# Altium PCB PCB2.PcbDoc (part 1 of 2)
Units mil, origin at the board's own origin, x right, y up, seen from the top; angles counter-clockwise.
Board outline 4285 x 3645 mil, 4 copper layers (Top Layer, Int1 (GND), Int2 (PWR), Bottom Layer), stack 53.912 mil thick; 114 components, 93 nets, 393 pads, 69 vias.
Unrouted connection lines stored in the file: 1.
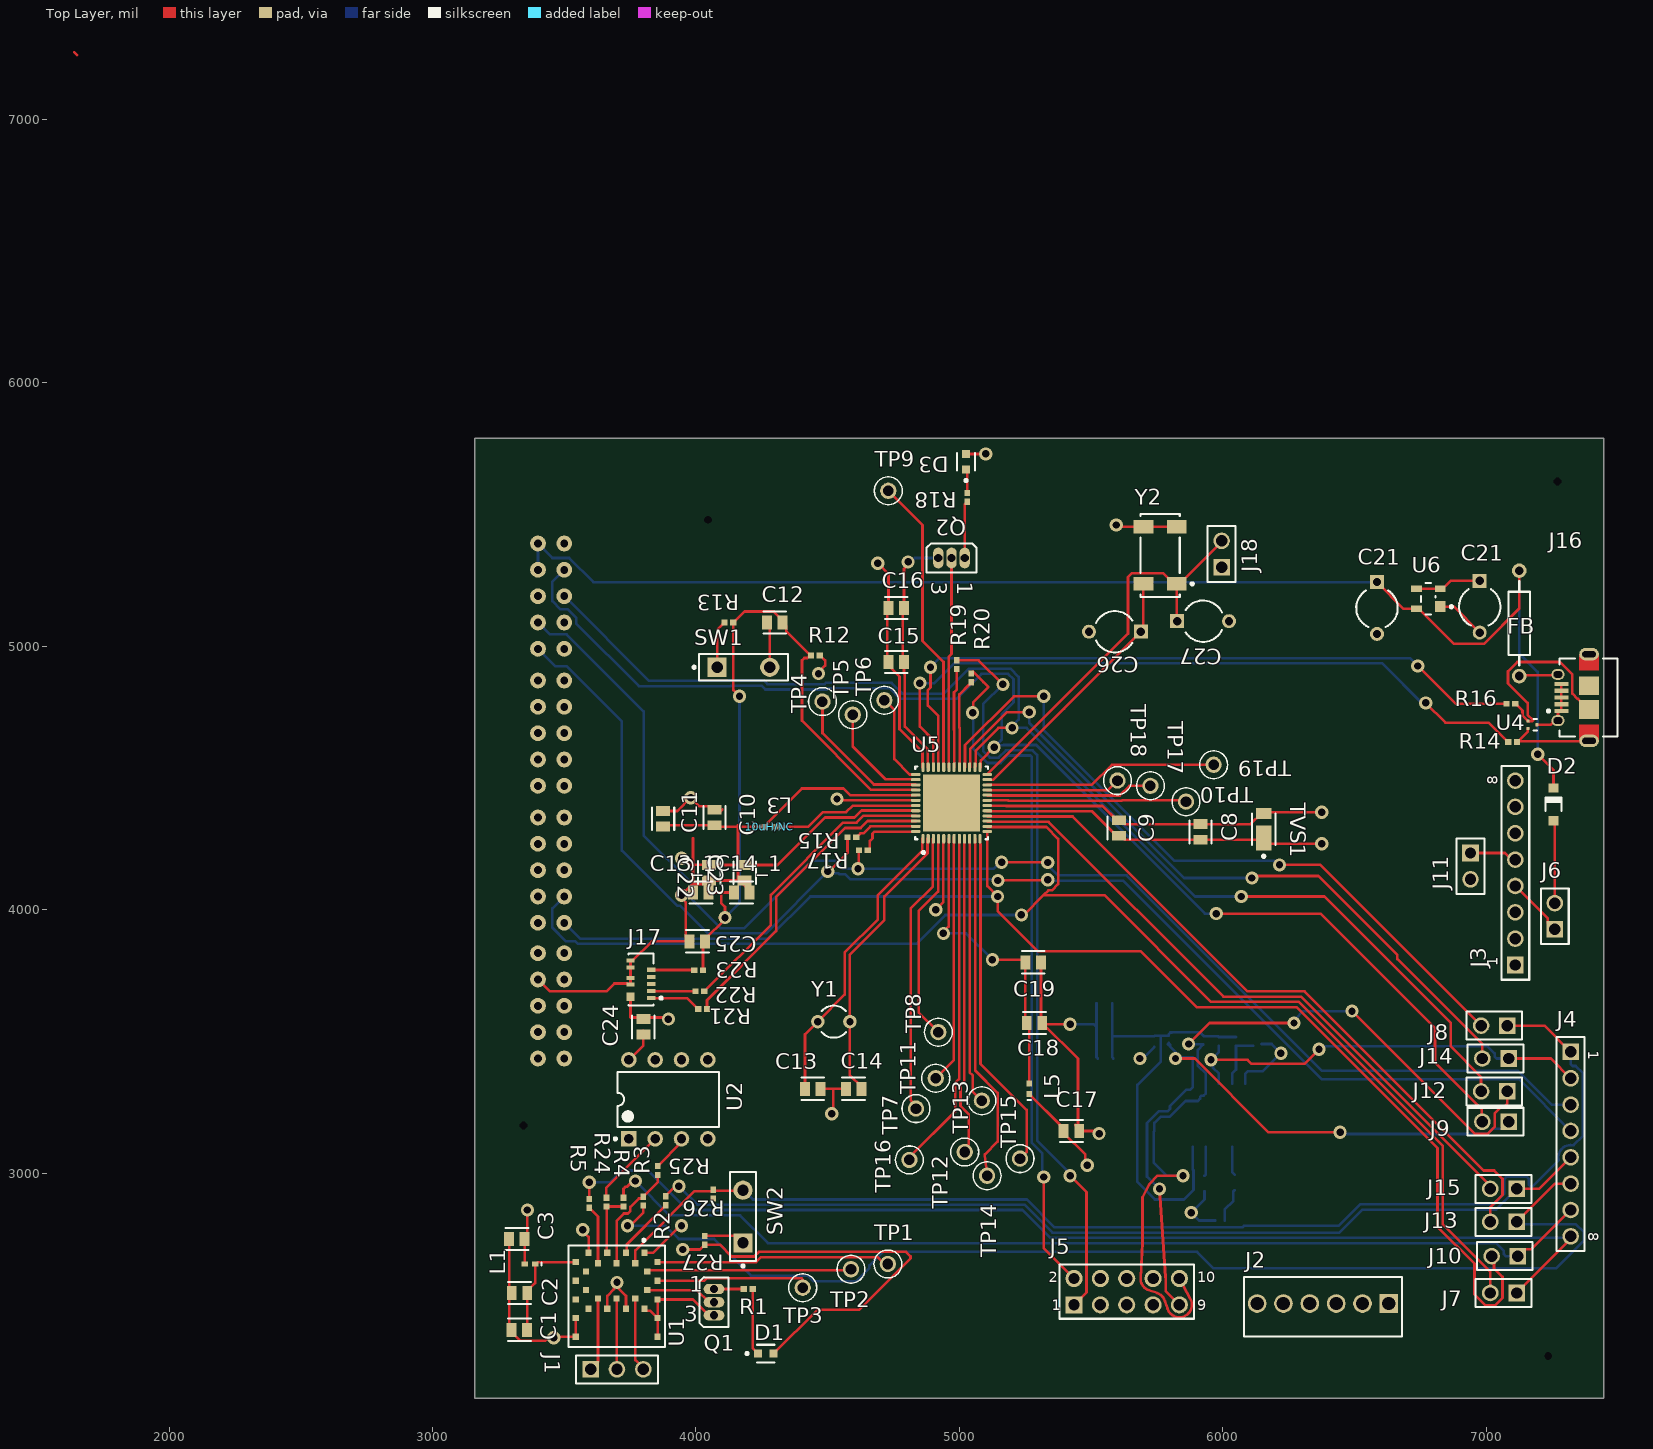
[diagram p0: Top Layer view]
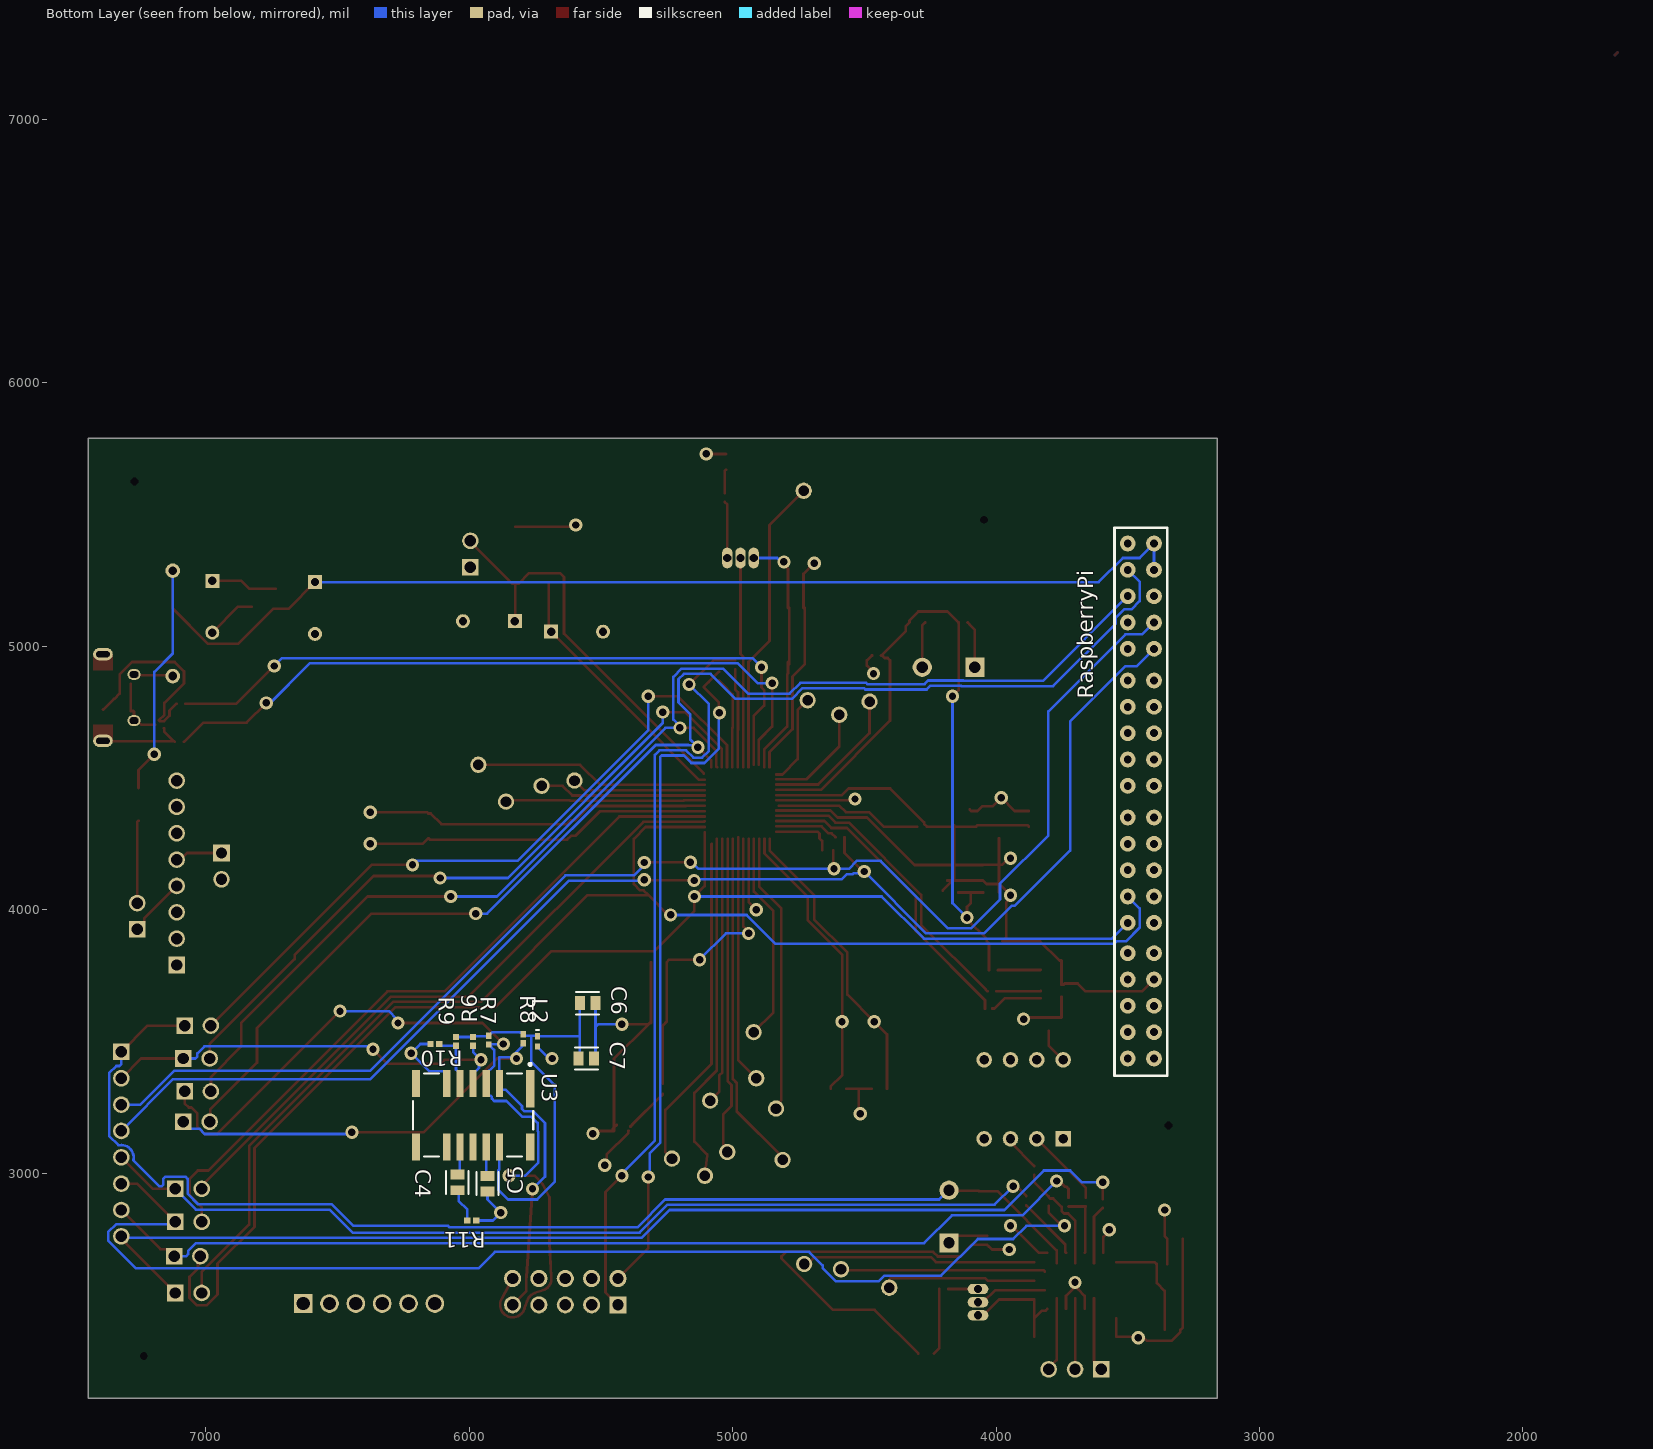
[diagram p1: Bottom Layer view, seen from below]
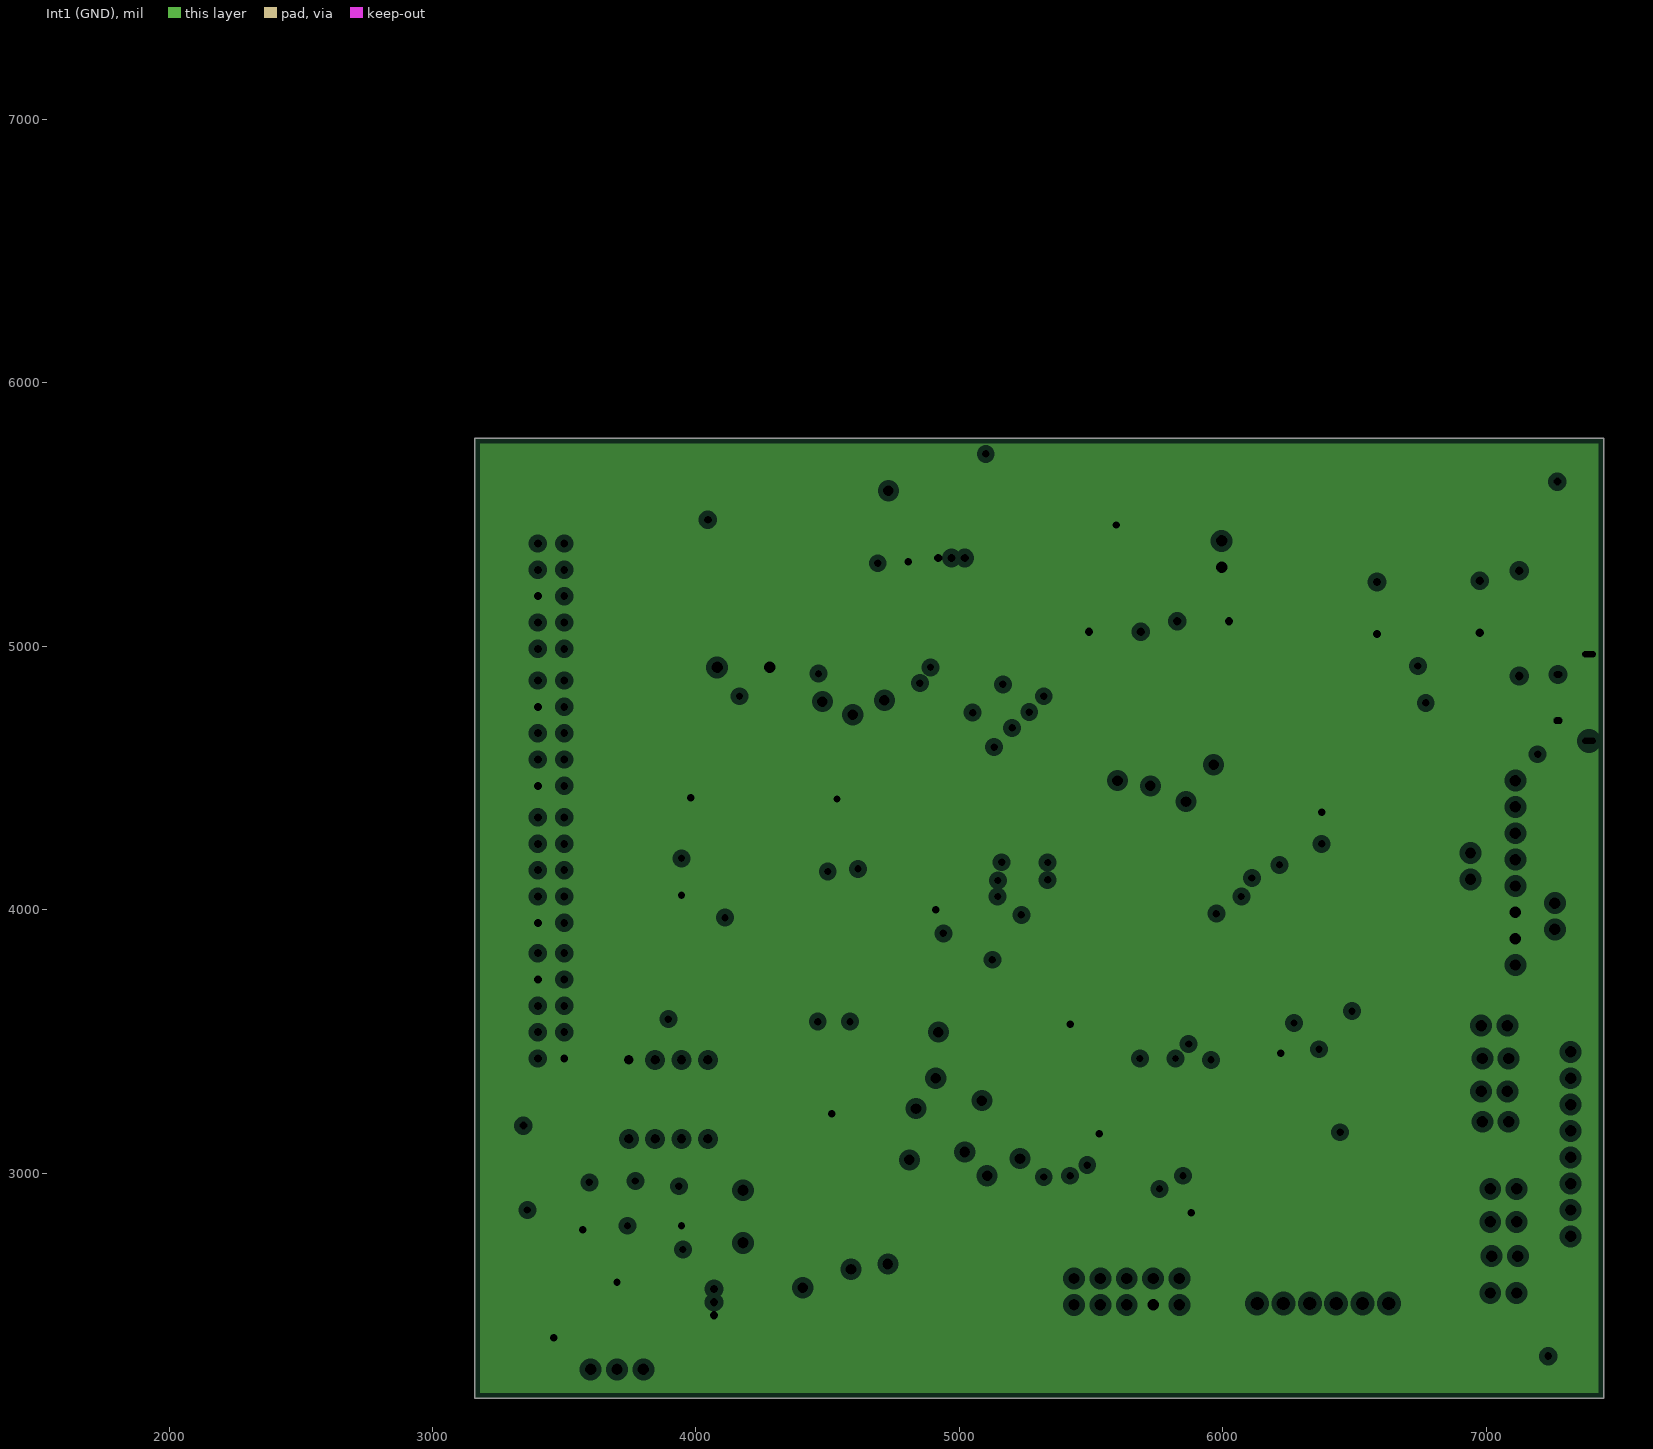
[diagram p2: Int1 (GND), clearances drawn from the general rule]
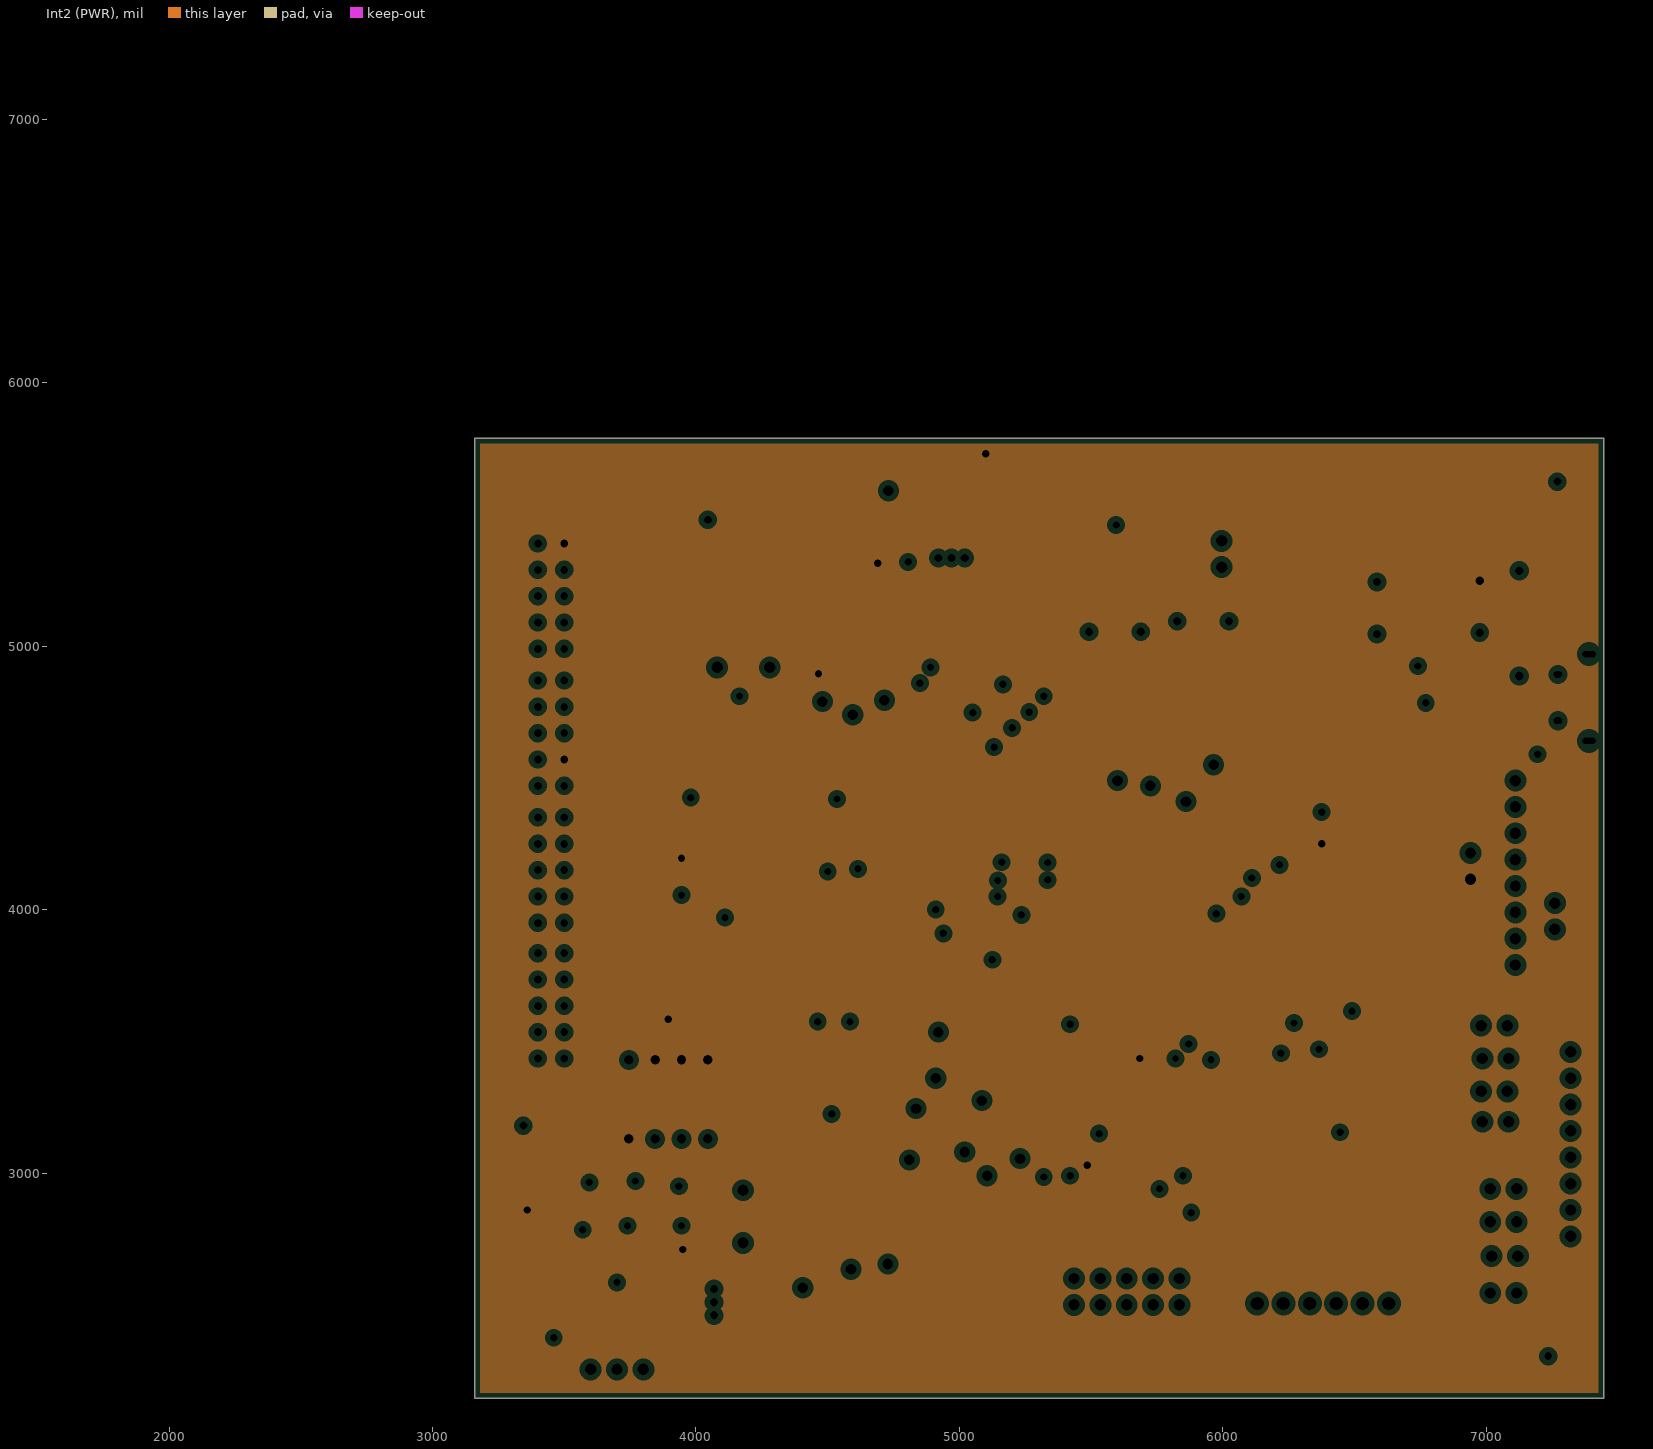
[diagram p3: Int2 (PWR), clearances drawn from the general rule]
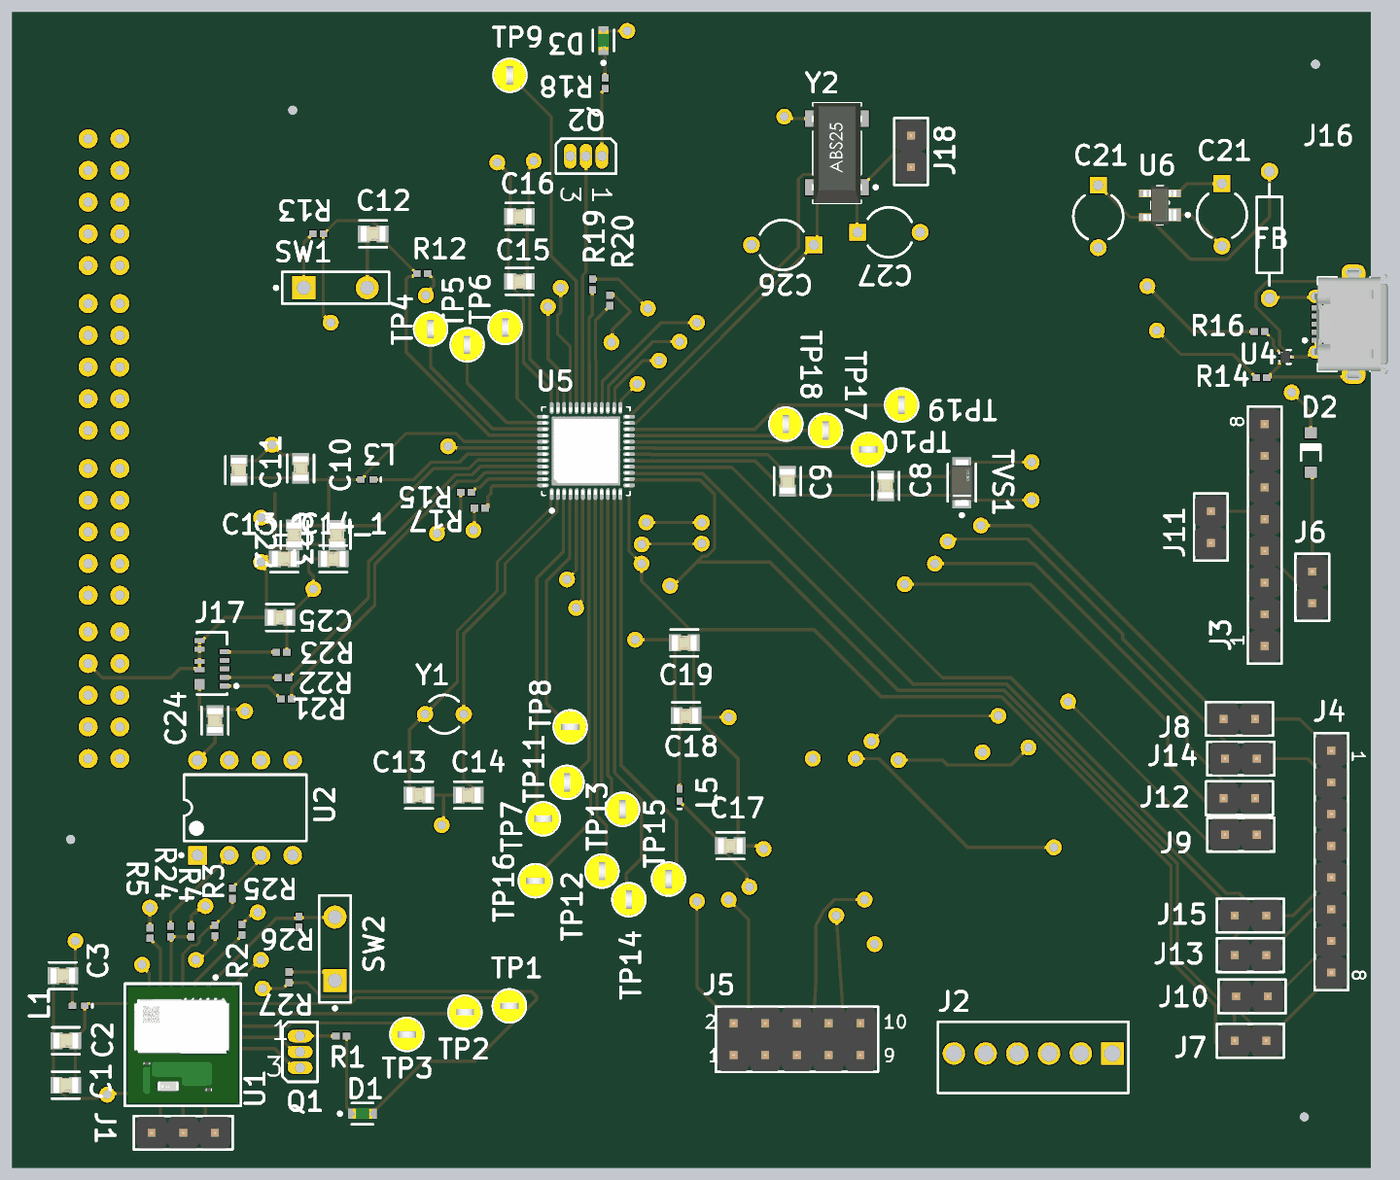
[diagram p4: 3D render of the assembled board from above, using the file's embedded part models]

## Layer stack, top to bottom
Top Solder: solder mask 1, SM-001, Dk 4
Top Layer: signal copper 1.378
Dielectric 1: prepreg 5.1, PP-017, Dk 4.3
Dielectric 2: prepreg 5.1, PP-017, Dk 4.3
Int1 (GND): plane copper 1.378, net GND
Dielectric 3: core 28, Core-039, Dk 4.8
Int2 (PWR): plane copper 1.378, net VDD3.3
Dielectric 4: prepreg 5.1, PP-017, Dk 4.3
Dielectric 5: prepreg 5.1, PP-017, Dk 4.3
Bottom Layer: signal copper 1.378
Bottom Solder: solder mask 1, SM-001, Dk 4

## Board outline
3160,2145 7445,2145 7445,5790 3160,5790

## Design rules (kind name [scope] priority, off if disabled: settings)
Clearance [All] p1: gap=10 ignorepadtopadclearanceinfootprint=FALSE except(0: Arc-Hole Track-Hole SMDPad-Hole THPad-Hole Via-Hole Fill-Hole Poly-Hole Region-Hole Text-Hole)
PlaneClearance [All] p1: clearance=20
PlaneConnect [All] p1: planeconnectstyle=Relief reliefexpansion=20 reliefentries=4 reliefconductorwidth=10 reliefairgap=10
PolygonConnect [All] p1: connectstyle=Relief reliefconductorwidth=10 reliefentries=4 polygonreliefangle="90 Angle" airgapwidth=10
RoutingVias [All] p1: holewidth=28 width=50 viastyle="Through Hole" minholewidth=28 minwidth=50 maxholewidth=28 maxwidth=50
SolderMaskExpansion [All] p1: expansion=4 istentingtop=FALSE
Width [All] p1: maxlimit=10 minlimit=10 preferedwidth=10
28 further rules are at their usual default settings.

## Classes and differential pairs
component class Sheet3: C1 C2 C3 D1 J1 L1 Q1 R1 R2 R3 R4 R5 R24 R25 R26 R27 SW2 TP1 TP2 TP3 U1 U2
component class Sheet2: C4 C5 C6 C7 D2 J2 J3 J4 J5 J6 j6 J7 J8 J9 J10 J11 J12 J13 J14 J15 L2 R6 R7 R8 R9 R10 R11 U3
component class Sheet1: 10uH/NC C8 C9 C10 C11 C12 C13 C14 C15 C16 C17 C18 C19 C21 C22 C23 C24 C25 C26 C27 D3 FB J16 J17 J18 L5 Q2 R12 R13 R14 R15 R16 R17 R18 R19 R20 R21 R22 R23 SW1 TP4 TP5 TP6 TP7 TP8 TP9 TP10 TP11 TP12 TP13 TP14 TP15 TP16 TP17 TP18 TP19 TVS1 U4 U5 U6 Y1 Y2

## Components (designator, comment, footprint, x,y, rotation, side; value= is the part's Value field where it differs from the comment)
10uH/NC "L3" 0402-A 4279.69,4315 r180 top value=10uH
C1 "10UF" FP-C0805C-DN-MFG 3329.53,2405 r180 top value="0.10 μF"
C2 "10UF" FP-C0805C-DN-MFG 3330,2545 r180 top value="0.10 μF"
C3 "10UF" FP-C0805C-DN-MFG 3320,2750 r180 top value="0.10 μF"
C4 "1UF" FP-C0805C-DN-MFG 6045,2964.53 r90 bottom value="0.10 μF"
C5 "1.5UF" FP-C0805C-DN-MFG 5930,2960 r90 bottom value="0.10 μF"
C6 "10UF" FP-C0805C-DN-MFG 5550,3645 r0 bottom value="0.10 μF"
C7 "100NF" FP-C0805C-DN-MFG 5555,3435 r0 bottom value="0.10 μF"
C8 "10UF" FP-C0805C-DN-MFG 5915,4295 r90 top value="0.10 μF"
C9 "100NF" FP-C0805C-DN-MFG 5605,4310 r90 top value="0.10 μF"
C10 "1UF" FP-C0805C-DN-MFG 4070,4350 r90 top value="0.10 μF"
C11 "100NF" FP-C0805C-DN-MFG 3875,4345 r90 top value="0.10 μF"
C12 "100PF" FP-C0805C-DN-MFG 4298.74,5090 r180 top value="0.10 μF"
C13 "22PF" FP-C0805C-DN-MFG 4443.27,3320 r180 top value="0.10 μF"
C13_1 "22PF" FP-C0805C-DN-MFG 4018.27,4065 r180 top value="0.10 μF" (schematic designator C13)
C14 "22PF" FP-C0805C-DN-MFG 4598.27,3320 r0 top value="0.10 μF"
C14_1 "22PF" FP-C0805C-DN-MFG 4173.27,4065 r0 top value="0.10 μF" (schematic designator C14)
C15 "100NF" FP-C0805C-DN-MFG 4760,4940 r0 top value="0.10 μF"
C16 "10UF" FP-C0805C-DN-MFG 4760,5145 r0 top value="0.10 μF"
C17 "10UF" FP-C0805C-DN-MFG 5425,3160 r180 top value="0.10 μF"
C18 "10UF" FP-C0805C-DN-MFG 5285,3570 r0 top value="0.10 μF"
C19 "100NF" FP-C0805C-DN-MFG 5280,3800 r0 top value="0.10 μF"
C21 "Cap2" CAPR5-4X5 6975,5150 r270 top value=10uF
C21 "Cap2" CAPR5-4X5 6585,5145 r270 top value=10uF
C22 "100NF" FP-C0805C-DN-MFG 4050,4140.47 r270 top value="0.10 μF"
C23 "10UF" FP-C0805C-DN-MFG 4185,4140 r270 top value="0.10 μF"
C24 "0.1UF" FP-C0805C-DN-MFG 3800,3555 r270 top value="0.10 μF"
C25 "100PF" FP-C0805C-DN-MFG 4005,3880 r180 top value="0.10 μF"
C26 "Cap2" CAPR5-4X5 5590,5055 r180 top value=12pF
C27 "Cap2" CAPR5-4X5 5925,5095 r0 top value=12pF
D1 "RED" FP-LTST-C190GKT-MFG 4265,2315 r0 top
D2 "1N4148W-7-F" DIOD-SOD123-2_V 7255,4400 r90 top
D3 "RED" FP-LTST-C190GKT-MFG 5025,5700 r90 top
FB "Res2" AXIAL-0.4 7125,5086.73 r270 top value=L4
J1 "61300311121" 61300311121 3700,2255 r0 top
J2 "ARDUINOHEADER" TECO-640456-6_V 6630,2505 r180 top
J3 "61300811121" 61300811121 7110,4140 r90 top
J4 "61300811121" 61300811121 7320,3110 r270 top
J5 "61301021121" 61301021121 5635,2550 r0 top
J6 "61300211121" 61300211121 7260,3975 r90 top
J7 "61300211121" 61300211121 7065,2545 r180 top
J8 "61300211121" 61300211121 7030,3560 r180 top
J9 "61300211121" 61300211121 7035,3195 r180 top
J10 "61300211121" 61300211121 7070,2685 r180 top
J11 "61300211121" 61300211121 6940,4165 r270 top
J12 "61300211121" 61300211121 7030,3310 r180 top
J13 "61300211121" 61300211121 7065,2815 r180 top
J14 "61300211121" 61300211121 7035,3435 r180 top
J15 "61300211121" 61300211121 7065,2940 r180 top
J16 "47589-0001" MOLX-47589-0001_V 7330.94,4805.28 r90 top
J17 "50 MIL KEYED SMD" VISH-VCNL4020-GS08_V 3790.63,3735.55 r180 top
J18 "61300211121" 61300211121 5995,5350 r90 top
L1 "Inductor" 0402-A 3370,2655 r180 top value=10uH
L2 "Inductor" 0402-A 5740,3500 r270 bottom value=10uH
L5 "Inductor" 0402-A 5265,3320 r90 top value=10uH
Q1 "BSS138LT3G" E3 4068.27,2510 r0 top
Q2 "BSS138LT3G" E3 4970,5335 r270 top
R1 "270" RESC1005X40X25NL05T10 4198.27,2560 r0 top
R2 "ZERO" RESC1005X40X25NL05T10 3885,2895 r270 top
R3 "ZERO" RESC1005X40X25NL05T10 3800,2893.27 r90 top
R4 "ZERO" RESC1005X40X25NL05T10 3725,2890 r270 top
R5 "ZERO" RESC1005X40X25NL05T10 3595,2885 r270 top
R6 "10K" RESC1005X40X25NL05T10 5985,3500 r270 bottom
R7 "10K" RESC1005X40X25NL05T10 5925,3505 r270 bottom
R8 "10K" RESC1005X40X25NL05T10 5795,3510 r270 bottom
R9 "10K/NC" RESC1005X40X25NL05T10 6050,3500 r270 bottom
R10 "10K/NC" RESC1005X40X25NL05T10 6130,3490 r180 bottom
R11 "20R" RESC1005X40X25NL05T10 5990,2820 r0 bottom
R12 "ZERO" RESC1005X40X25NL05T10 4453.27,4965 r0 top
R13 "ZERO" RESC1005X40X25NL05T10 4125,5090 r180 top
R14 "28" RESC1005X40X25NL05T10 7100,4636.73 r0 top
R15 "ZERO" RESC1005X40X25NL05T10 4591.73,4275 r180 top
R16 "28" RESC1005X40X25NL05T10 7093.27,4781.73 r0 top
R17 "ZERO" RESC1005X40X25NL05T10 4635,4225 r180 top
R18 "270" RESC1005X40X25NL05T10 5030,5565 r270 top
R19 "ZERO" RESC1005X40X25NL05T10 4990,4930 r270 top
R20 "ZERO" RESC1005X40X25NL05T10 5045,4880 r270 top
R21 "ZERO" RESC1005X40X25NL05T10 4025,3623.27 r0 top
R22 "ZERO" RESC1005X40X25NL05T10 4015,3690 r180 top
R23 "100" RESC1005X40X25NL05T10 4010,3770 r180 top
R24 "ZERO" RESC1005X40X25NL05T10 3660,2890 r270 top
R25 "ZERO" RESC1005X40X25NL05T10 3855,3010 r270 top
R26 "2K2" RESC1005X40X25NL05T10 4065,2920 r270 top
R27 "2K2" RESC1005X40X25NL05T10 4033.27,2745 r90 top
SW1 "SW TACT" SPST-2 4180,4920 r0 top
SW2 "SW TACT" SPST-2 4178.27,2835 r90 top
TP1 "5004" FP-5004-MFG 4728.27,2655 r0 top
TP2 "5004" FP-5004-MFG 4588.27,2635 r180 top
TP3 "5004" FP-5004-MFG 4405,2565 r180 top
TP4 "5004" FP-5004-MFG 4480,4790 r90 top
TP5 "5004" FP-5004-MFG 4595,4740 r90 top
TP6 "5004" FP-5004-MFG 4715,4795 r90 top
TP7 "5004" FP-5004-MFG 4835,3245 r180 top
TP8 "5004" FP-5004-MFG 4920,3535 r180 top
TP9 "5004" FP-5004-MFG 4730,5590 r90 top
TP10 "5004" FP-5004-MFG 5860,4410 r180 top
TP11 "5004" FP-5004-MFG 4910,3360 r90 top
TP12 "5004" FP-5004-MFG 5020,3080 r270 top
TP13 "5004" FP-5004-MFG 5085,3275 r270 top
TP14 "5004" FP-5004-MFG 5105,2990 r270 top
TP15 "5004" FP-5004-MFG 5230,3055 r270 top
TP16 "5004" FP-5004-MFG 4810,3050 r180 top
TP17 "5004" FP-5004-MFG 5725,4470 r270 top
TP18 "5004" FP-5004-MFG 5600,4490 r270 top
TP19 "5004" FP-5004-MFG 5965,4550 r270 top
TVS1 "5V 350W" FP-PowerDI123-MFG 6155,4305 r270 top value=23pF
U1 "PAN1740" FP-ENW-89846A1KF-MFG 3698.7,2532.24 r180 top
U2 "W25X20CL" PDIP300-P8 3895,3280 r90 top
U3 "GRID-EYE-SENSOR" FP-AMG8834-MFG 5985,3219.92 r270 bottom
U4 "TPD2EUSB30" DRT0003A 7175,4701.73 r0 top
U5 "SAM L21G" FP-PE-MFG 4970,4405 r90 top
U6 "NX1117CE33Z" FP-DZD0004A-MFG 6780,5180 r90 top
Y1 "32.768kHz" R38 4523.27,3575 r270 top
Y2 "16MHz" ABRA-ABS25-4_V 5761.38,5345 r90 top

## Footprints (in the part's own frame and the unit in brackets; to place one, negate y for a bottom-side part, rotate by r counter-clockwise, add the part's x,y. Pads: shape width x height; smd on the part's side, far side on the other; paste and mask are expansions set on the pad)
0402-A [mm] "Chip Inductor, Body 1.0x0.5mm, IPC High Density"
  rect 0.6x0.5 smd: 1(-0.5,0) 2(0.5,0)
  silkscreen extent -1.1,-0.15 -1.1,0.15, body extent -0.55,-0.3 0.55,0.3, height 0.55
61300211121 [mm] "Pin Header, pitch 2.54 mm, THT, Vertical, single row, 2p"
  rect 1.6x1.6 hole 1.1: 1(-1.27,0)
  round 1.6 hole 1.1: 2(1.27,0)
  silkscreen extent -2.69,-1.35 2.69,1.35, body extent -2.54,-1.27 2.54,1.27, height 8.57
61300311121 [mm] "Pin Header, pitch 2.54 mm, THT, Vertical, single row, 3p"
  rect 1.6x1.6 hole 1.1: 1(-2.54,0)
  round 1.6 hole 1.1: 2(0,0) 3(2.54,0)
  silkscreen extent -3.96,-1.35 3.96,1.35, body extent -3.81,-1.27 3.81,1.27, height 8.57
61300811121 [mm] "Pin Header, pitch 2.54 mm, THT, Vertical, single row, 8p"
  rect 1.6x1.6 hole 1.1: 1(-8.89,0)
  round 1.6 hole 1.1: 2(-6.35,0) 3(-3.81,0) 4(-1.27,0) 5(1.27,0) 6(3.81,0) 7(6.35,0) 8(8.89,0)
  silkscreen extent -10.31,-1.35 10.31,1.35, body extent -10.16,-1.27 10.16,1.27, height 8.57
61301021121 [mm] "Pin Header, pitch 2.54 mm, THT, Vertical, dual row, 10p"
  rect 1.65x1.65 hole 1.1: 1(-5.08,-1.27)
  round 1.65 hole 1.1: 2(-5.08,1.27) 3(-2.54,-1.27) 4(-2.54,1.27) 5(0,-1.27) 6(0,1.27) 7(2.54,-1.27) 8(2.54,1.27) 9(5.08,-1.27) 10(5.08,1.27)
  silkscreen extent -6.5,-2.62 6.5,2.62, body extent -6.35,-2.54 6.35,2.54, height 8.59
ABRA-ABS25-4_V [mm] "SMD, 4-Leads, Body 8x3.8mm, Pitch 5.5mm, Height 2.5mm"
  rect 1.3x1.9 smd: 1(-2.75,-1.6) 2(2.75,-1.6) 3(2.75,1.6) 4(-2.75,1.6)
  silkscreen extent -4,-3.22 4,1.9, body extent -4,-2 4,2, height 2.66
AXIAL-0.4 [mm] "Axial Device, Thru-Hole; 2 Leads; 0.4 in Pin Spacing"
  round 1.4 hole 0.85: 1(-5.08,0) 2(5.08,0)
  silkscreen extent -4.06,-1.02 4.06,1.02
CAPR5-4X5 [mm] "Capacitor; 2 Leads"
  rect 1.35x1.35 hole 0.8: 1(-2.5,0)
  round 1.35 hole 0.8: 2(2.5,0)
  silkscreen extent -1.69,-2 1.82,2
DIOD-SOD123-2_V [mm] "SOD123, 2-Leads, Body 2.7x1.55mm, Height 1.45mm"
  rect 0.9x0.95 smd: 1(-1.575,0) 2(1.575,0)
  silkscreen extent -0.64,-0.83 0.64,0.77, body extent -1.35,-0.77 1.35,0.77, height 1.45
DRT0003A [mm] "SOTFL, 3-Leads, Body 1x1mm (inc leads), Pitch 0.35mm"
  rrect33% 0.3x0.3 smd: 1(-0.425,0.35) 2(-0.425,-0.35) 3(0.425,0)
  silkscreen extent 0.13,-0.55 0.43,0.55, body extent -0.5,-0.5 0.5,0.5, height 0.5
E3 [mm] "TO, Flat Index; 3 In-Line, Axial Leads; Body Dia. 4.6mm; Lead Dia. 0.5 mm (max)"
  oval 2x1 hole 0.8: 1(0,1.27) 2(0,0) 3(0,-1.27)
  silkscreen extent -1.41,-2.41 1.41,2.41
FP-5004-MFG [mm]
  round 1.57 hole 1.02 paste-1000 mask+0: 1(0,0)
  silkscreen extent -1.35,-1.34 1.35,1.34, body extent -1.45,-1.45 1.45,1.45, height 0.25
FP-AMG8834-MFG [mm]
  rect 3.6x0.8 smd paste+0 mask+0: 1(-2.55,5.5)
  rect 2.6x0.7 smd paste+0 mask+0: 2(-3.05,2.54) 3(-3.05,1.27) 4(-3.05,0) 5(-3.05,-1.27) 6(-3.05,-2.54) 9(3.05,-2.54) 10(3.05,-1.27) 11(3.05,0) 12(3.05,1.27) 13(3.05,2.54)
  rect 2.6x0.8 smd paste+0 mask+0: 7(-3.05,-5.5) 8(3.05,-5.5) 14(3.05,5.5)
  silkscreen extent -5.02,-5.8 4,5.8, body extent -4,-5.8 4,5.8, height 4.3
FP-C0805C-DN-MFG [mm]
  rect 0.95x1.35 smd paste+0 mask+0: 1(-0.75,0) 2(0.75,0)
  silkscreen extent -1.1,-1.07 1.1,1.07, body extent -1.4,-0.85 1.4,0.85, height 0.25
FP-DZD0004A-MFG [mm]
  rect 1.05x1.05 smd paste-1000 mask+0: 1(-0.76,-1.15)
  rect 0.6x1.05 smd paste-1000 mask+0: 2(0.96,-1.15) 3(0.96,1.15) 4(-0.96,1.15)
  silkscreen extent -1.52,-2.35 1.52,0.7, body extent -1.62,-1.78 1.62,1.78, height 0.25
FP-ENW-89846A1KF-MFG [mm]
  rect 0.6x0.6 smd paste+0 mask+0: 1(-2.7,-4.2) 2(-1.8,-3.2) 3(-0.9,-4.2) 4(0,-3.2) 5(0.9,-4.2) 6(1.8,-3.2) 7(2.7,-4.2) 8(3.95,-3.3) 9(2.95,-2.4) 10(3.95,-1.5) 11(2.95,-0.6) 12(3.95,0.3) 13(2.7,1.2) 14(1.8,0.2) 15(0.9,1.2) 16(0,0.2) 17(-0.9,1.2) 18(-1.8,0.2) 19(-2.7,1.2) 20(-3.95,0.3) 21(-2.95,-0.6) 22(-3.95,-1.5) 23(-2.95,-2.4) 24(-3.95,-3.3) A(-3.95,2.1) B(3.95,2.1) C(-3.95,3.9) D(3.95,3.9)
  silkscreen extent -4.65,-5.52 4.65,4.9, body extent -4.75,-5 4.75,5, height 0.25
FP-LTST-C190GKT-MFG [mm]
  rect 0.8x0.8 smd paste+0 mask+0: 1(-0.75,0) 2(0.75,0)
  silkscreen extent -1.92,-0.85 0.85,0.85, body extent -1.25,-0.55 1.25,0.55, height 0.25
FP-PE-MFG [mm]
  rrect100% 0.95x0.3 smd paste+0 mask+0: 1(-3.45,2.75) 2(-3.45,2.25) 3(-3.45,1.75) 4(-3.45,1.25) 5(-3.45,0.75) 6(-3.45,0.25) 7(-3.45,-0.25) 8(-3.45,-0.75) 9(-3.45,-1.25) 10(-3.45,-1.75) 11(-3.45,-2.25) 12(-3.45,-2.75) 25(3.45,-2.75) 26(3.45,-2.25) 27(3.45,-1.75) 28(3.45,-1.25) 29(3.45,-0.75) 30(3.45,-0.25) 31(3.45,0.25) 32(3.45,0.75) 33(3.45,1.25) 34(3.45,1.75) 35(3.45,2.25) 36(3.45,2.75)
  rrect100% 0.3x0.95 smd paste+0 mask+0: 13(-2.75,-3.45) 14(-2.25,-3.45) 15(-1.75,-3.45) 16(-1.25,-3.45) 17(-0.75,-3.45) 18(-0.25,-3.45) 19(0.25,-3.45) 20(0.75,-3.45) 21(1.25,-3.45) 22(1.75,-3.45) 23(2.25,-3.45) 24(2.75,-3.45) 37(2.75,3.45) 38(2.25,3.45) 39(1.75,3.45) 40(1.25,3.45) 41(0.75,3.45) 42(0.25,3.45) 43(-0.25,3.45) 44(-0.75,3.45) 45(-1.25,3.45) 46(-1.75,3.45) 47(-2.25,3.45) 48(-2.75,3.45)
  rect 5.5x5.5 smd paste+0 mask+0: 49(0,0)
  silkscreen extent -4.9,-3.5 3.5,3.5, body extent -4.03,-4.03 4.03,4.03, height 0.25
FP-PowerDI123-MFG [mm]
  rect 2.4x1.5 smd paste+0 mask+0: 1(0.85,0)
  rect 1.05x1.5 smd paste+0 mask+0: 2(-1.525,0)
  silkscreen extent -1.5,-1.12 2.72,1.12, body extent -2.15,-1.06 2.15,1.06, height 0.25
MOLX-47589-0001_V [mm] "SMD, 5-Leads, Body 7.5x5.6mm, Pitch 0.65mm"
  rect 0.4x1.35 smd: 1(-1.3,1.175) 2(-0.65,1.175) 3(0,1.175) 4(0.65,1.175) 5(1.3,1.175)
  oval 1.05x1.25 hole 0.65 slot 0.85 at 90 deg: 6(-2.225,1.5) 7(2.225,1.5)
  oval 1.2x1.9 hole 0.6 slot 1.3 at 90 deg: 8(-4.175,-1.5) 11(4.175,-1.5)
  rect 1.8x1.9 smd: 9(-1.15,-1.5) 10(1.15,-1.5)
  Top Layer region: 2.6,-2.45 4.175,-2.45 4.175,-0.55 2.6,-0.55
  Top Layer region: -2.6,-0.55 -4.175,-0.55 -4.175,-2.45 -2.6,-2.45
  silkscreen extent -3.75,-4.25 3.75,2.52, body extent -4.32,-4.25 4.32,1.64, height 2.74
PDIP300-P8 [mm] "8-Pin Plastic Dual In-Line Package (PDIP)"
  rect 1.5x1.5 hole 0.9: 1(-3.81,3.81)
  round 1.5 hole 0.9: 2(-3.81,1.27) 3(-3.81,-1.27) 4(-3.81,-3.81) 5(3.81,-3.81) 6(3.81,-1.27) 7(3.81,1.27) 8(3.81,3.81)
  silkscreen extent -3.93,-4.9 2.65,5.23, body extent -3.55,-4.9 3.55,4.9, height 4.32
R38 [mm] "Crystal, Thru-Hole; 2 Leads; Body 3.1 x 8.2 mm (Dia.xH)"
  round 1.3 hole 0.7: 1(0,1.55) 2(0,-1.55)
  silkscreen extent -1.55,-1.19 1.55,1.17
RESC1005X40X25NL05T10 [mm] "Chip Resistor, 2-Leads, Body 1.00x0.50mm, IPC Medium Density"
  rect 0.6x0.55 smd: 1(-0.425,0) 2(0.425,0)
  body extent -0.53,-0.27 0.53,0.28, height 0.4
SPST-2 [mm] "Switch; 2 Leads"
  rect 1.85x1.85 hole 1.1: 1(-2.54,0)
  round 1.85 hole 1.1: 2(2.54,0)
  silkscreen extent -4.89,-1.27 4.28,1.27
TECO-640456-6_V [mm] "THD, 6-Leads, Body 15.24x5.72mm, Pitch 2.54mm"
  rect 1.8x1.8 hole 1.3: 1(0,0)
  round 1.8 hole 1.3: 2(2.54,0) 3(5.08,0) 4(7.62,0) 5(10.16,0) 6(12.7,0)
  silkscreen extent -1.27,-2.54 13.97,3.18, body extent -1.27,-2.54 13.97,3.18, height 10.03
VISH-VCNL4020-GS08_V [mm] "SMD, 10-Leads, Body 4.9x2.4mm"
  rect 0.8x0.4 smd paste+0: 1(-1,1.815) 2(-1,1.13) 3(-1,0.445) 4(-1,-0.24) 5(-1,-0.925) 6(1,-1.815) 7(1,-1.135) 8(1,-0.135) 9(1,0.515)
  rect 0.8x0.83 smd paste+0: 10(1,1.68)
  silkscreen extent -2.08,-2.48 1.2,2.51, body extent -1.2,-2.43 1.2,2.47, height 0.83

## Part data
10uH/NC: library part Inductor, "Inductor", Code_IEC=1005, Code_JEITA=0402, LatestRevisionDate=29-May-2009, LatestRevisionNote="IPC-7351 Footprint Added.", PackageDescription="Chip Inductor", PackageReference=0402-A, Published=8-Jun-2000, Publisher="Altium Limited"
C1 C2 C3 C4 C5 C6 C7 C8 C9 C10 C11 C12 C13 C13_1 C14 C14_1 C15 C16 C17 C18 C19 C22 C23 C24 C25: library part CMP-2007-00279-2, "CAP CER 0.1UF 50V X7R 0805", Capacitance="0.10 μF", Manufacturer=KEMET, Manufacturer Part Number=C0805C104K5RACTU, Package=C0805C-DN, Temperature="-55°C to +125°C", Temperature Characteristic=X7R, Temperature Coefficient=30ppm/°C, Temperature Range High=+125°C, Temperature Range Low=-55°C, Tolerance=0.1, Voltage Rating="50 V", Automotive=No, Category=Cap, ComponentLink2Description=Datasheet, ComponentLink2URL=https://content.kemet.com/datasheets/KEM_C1003_C0G_SMD.pdf, Device Class L1="Passive Components", Device Class L2=Capacitors, Device Class L3="Ceramic Capacitors", Digikey Description="CAP CER 0.1UF 50V X7R 0805", Height=0.88mm, Ipc Land Pattern Name=CAPC200125X78, Lead Free=Yes, Material=Ceramic, Mouser Description="Cap Ceramic 0.1uF 50V X7R 10% SMD 2.0 x 1.2 mm 125 C Paper T/R", Octopart=https://octopart.com/c0805c104k5ractu-kemet-143926, RoHS=TRUE
C21 C21 C26 C27: "Capacitor", PackageDescription="Capacitor; 2 Leads", PackageReference=CAPR5-4X5, Published=23-Sep-2002, Publisher="Altium Limited"
D1 D3: library part CMP-22017-000005-2, "LED GREEN CLEAR CHIP SMD", Case Code (Imperial)=0603, Case Code (Metric)=1608, Color=Green, Forward Current=30mA, Forward Voltage=2.1V, Lens Color=Colorless, Max Operating Temperature=85°C, Min Operating Temperature=-55°C, Package Quantity=1, Power Dissipation=100mW, Reverse Voltage=5V, Test Current=10mA, Voltage=2V, Case/Package=0603, Depth=0.8mm, Dominant Wavelength=569nm, Height=0.8mm, Illumination Color=Green, Lead Free="Lead Free", Length=1.6mm, Lens Style=Clear, Lens Transparency=Clear, Luminous Intensity=6mcd, Mount="Surface Mount", Number of Elements=1, Number of LEDs=1, Number of Pins=2, Packaging="Tape and Reel", Power Rating=100mW, Radiation Hardening=No, Viewing Angle=130°, Wavelength=565nm, Width=0.8mm
D2: library part CMP-2000-04932-2, "Fast Switching Diode, 100 V, 0.15 A, -65 to 150 degC, 2-Pin?SOD123, RoHS, Tape and Reel", If - Forward Current=0.15A, Ir - Reverse Current=1uA, Manufacturer=DiodesIncorporated, Max Surge Current=2A, Maximum Operating Temperature=+150C, Minimum Operating Temperature=-65C, Operating Temperature Range=-65Cto+150C, Package / Case=SOD-123, Package Reference=SOD123-2, Peak Reverse Voltage=100V, Vf - Forward Voltage=1.25V, Brand=DiodesIncorporated, Configuration=Single, Datasheet URL=http://www.farnell.com/datasheets/1915529.pdf, Datasheet Version="Rev. 24-2, 10/2013", Factory Pack Quantity=3000, Height=1.25mm, Length=2.85mm, Manufacturer URL=http://www.diodes.com/, Mounting Style=SMD/SMT, Package URL=http://www.diodes.com/datasheets/ds18004.pdf, Packaging=Reel, Product=SwitchingDiodes, Product Category=Diodes-GeneralPurpose,Power,Switching, Recovery Time=4ns, RoHS=True, Series=1N4148, Type=SwitchingDiode, Unit Weight=0.000353oz, Width=1.7mm
FB: "Resistor", LatestRevisionDate=17-Jul-2002, LatestRevisionNote="Re-released for DXP Platform.", PackageDescription="Axial Device, Thru-Hole; 2 Leads; 0.4 in Pin Spacing", PackageReference=AXIAL-0.4, Published=8-Jun-2000, Publisher="Altium Limited"
J1: library part CMP-1502-01062-1, "THT Vertical Pin Header WR-PHD, Pitch 2.54 mm, Single Row, 3 pins", Contact Resistance=20mOhm, Manufacturer="Wurth Elektronik", Operating temperature=-40to105degC, Rated Current=3A, Withstanding Voltage=500VAC, Working Voltage=250VAC, Datasheet URL=https://katalog.we-online.de/em/datasheet/6130xx11121.pdf, Gender=Male, Manufacturer URL=http://www.we-online.de, Mounting Technology=THT, Orientation=Vertical, Package Reference=61300311121, Packaging=Bag, Part Number=61300311121, Pin Number=3, Pitch=2.54mm, Publisher=WurthElektronik, Row Number=Single
J2: library part CMP-2000-05661-1, "Male Header, Pitch 2.54 mm, 1 x 6 Position, Height 10.03 mm, Tail Length 3.56 mm, -55 to 105 degC, Bulk", Color=White, Current, Rating="5 /  / A", Flammability Rating=UL94V-0, Manufacturer="TE Connectivity", Package Description="Male Header, Pitch 2.54 mm, 1 x 6 Position, Height 10.03 mm, Tail Length 3.56 mm", Package Reference=640456-6, Temperature, Operating="-55to+105 /  / °C", Voltage, Rating="250 /  / V", Agency Approvals=CSA,UL, Angle=Straight, Brand/Series=MTA-100Series, Color, Housing=White, Connector Type=MTA-100, Contact Centerline Spacing="0.100 /  / in.", Contact Mating Area Plating=Tin, Contact Plating=Tin, Contact Shape=Square, Contact Termination Area Plating=Tin, Datasheet URL=https://datasheet.ciiva.com/25618/0900766b80eb7fdd-25618163.pdf, Datasheet Version="Rev. W, 05/2005", Length, Overall="0.6 /  / \"", Length, Pin="0.14 /  / \"", Length, Terminal Post="0.14 /  / in.", Manufacturer URL=http://www.te.com/, Material, Contact=CopperAlloy, Material, Housing=Polyester, Mount Angle=Vertical, Mounting Hole Size="0.04 /  / \"", Mounting Technology=ThroughHole, Mounting Type=PCMount, Number of Contacts=6, Number of Positions=6, Number of Rows=1, Pin Spacing="0.1 /  / \"", Primary Type=InterconnectSystem, Size, Post="0.025 /  / in.", Special Features=Pinstrip, Standards=RoHSCompliant,ELVCompliant,UL94V-0, Termination=Solder, Type=PCBPlug
J3 J4: library part CMP-1502-01076-1, "THT Vertical Pin Header WR-PHD, Pitch 2.54 mm, Single Row, 8 pins", Contact Resistance=20mOhm, Manufacturer="Wurth Elektronik", Operating temperature=-40to105degC, Rated Current=3A, Withstanding Voltage=500VAC, Working Voltage=250VAC, Datasheet URL=https://katalog.we-online.de/em/datasheet/6130xx11121.pdf, Gender=Male, Manufacturer URL=http://www.we-online.de, Mounting Technology=THT, Orientation=Vertical, Package Reference=61300811121, Packaging=Bag, Part Number=61300811121, Pin Number=8, Pitch=2.54mm, Publisher=WurthElektronik, Row Number=Single
J5: library part CMP-1502-01084-1, "THT Vertical Pin Header WR-PHD, Pitch 2.54 mm, Dual Row, 10 pins", Contact Resistance=20mOhm, Manufacturer="Wurth Elektronik", Operating temperature=-40to105degC, Rated Current=3A, Withstanding Voltage=500VAC, Working Voltage=250VAC, Datasheet URL=https://katalog.we-online.de/em/datasheet/6130xx21121.pdf, Gender=Male, Manufacturer URL=http://www.we-online.de, Mounting Technology=THT, Orientation=Vertical, Package Reference=61301021121, Packaging=Bag, Part Number=61301021121, Pin Number=10, Pitch=2.54mm, Publisher=WurthElektronik, Row Number=Dual
J6 J7 J8 J9 J10 J11 J12 J13 J14 J15 J18: library part CMP-1712-00002-4, "THT Vertical Pin Header WR-PHD, Pitch 2.54 mm, Single Row, 2 pins", Contact Resistance=20mOhm, Manufacturer="Wurth Elektronik", Operating temperature=-40to105degC, Rated Current=3A, Withstanding Voltage=500VAC, Working Voltage=250VAC, Datasheet URL=https://katalog.we-online.de/em/datasheet/6130xx11121.pdf, Gender=Male, Manufacturer URL=http://www.we-online.de, Mounting Technology=THT, Orientation=Vertical, Package Reference=61300211121, Packaging=Bag, Part Number=61300211121, Pin Number=2, Pitch=2.54mm, Publisher=WurthElektronik, Row Number=Single
J16: library part CMP-2000-05610-1, "Right Angle Female Type AB Micro USB Connector, 30 V, 1.8 A, -30 to 85 degC, RoHS, Tape and Reel", Color=Black, Current Rating=1.8A, Manufacturer=Molex, Operating Temperature Range=-20Cto+85C, Package Description="Micro USB Connector, Pitch 0.65 mm, 5 Positions, Body 7.5 x 5.6 mm", Voltage Rating=30VAC, Brand=Molex, Connector Type=MicroUSBTypeABreceptacle, Contact Material=CopperAlloy, Contact Plating=Gold, Datasheet URL=http://www.molex.com/webdocs/datasheets/pdf/en-us/0475890001_IO_CONNECTORS.pdf, Datasheet Version=12/2016, Gender=Female, Manufacturer URL=http://www.molex.com/, Mounting Angle=Right, Mounting Technology=SurfaceMount, Number of Contacts=5Contact, Number of Ports=1Port, Package Reference=47589-0001, Package URL=http://www.molex.com/pdm_docs/sd/475890001_sd.pdf, Packaging=Reel, Product=MicroUSBTypeABConnectors, Product Category=USBConnectors, RoHS=True, Series=47589, Standard=USB, Termination Style=SMD/SMT
J17: library part CMP-2000-07387-1, "Fully Integrated Proximity and Ambient Light Sensor with Infrared Emitter, I2C Interface, and Interrupt Function, 2.5 to 3.6 V, -25 to 85 degC, 10-Pin SMD, RoHS, Tape and Reel", Manufacturer=Vishay, Operating temperature=-25°C~85°C, Package / Case=10-VDFN, Package Description="10-Pin Surface Mount Device, Body 4.9 x 2.4 mm", Package Reference=VCNL4020-GS08, Standard Package=1, Supplier Device Package=SMD, Voltage - Supply=2.5V~3.6V, Category=Sensors,Transducers, Datasheet URL=http://www.vishay.com/docs/83476/vcnl4020.pdf, Datasheet Version="Rev. 1.5, 08/2014", Family=OpticalSensors-AmbientLight,IR,UVSensors, Featured Product=VCNL4020OpticalSensor, Manufacturer URL=http://www.vishay.com/, Mounting Technology=SurfaceMount, Mounting Type=SurfaceMount, Other Names=VCNL4020-GS08DKR, Output Type=I²C, Packaging=Digi-Reel®, Proximity Detection=Yes, Series=-, Type=Ambient, Wavelength=-
Q1 Q2: library part MOSFET-N, "N-Channel MOSFET", LatestRevisionDate=17-Jul-2002, LatestRevisionNote="Re-released for DXP Platform.", PackageDescription="TO, Flat Index; 3 In-Line, Axial Leads; Body Dia. 4.6mm; Lead Dia. 0.5 mm (max)", PackageReference=E3, PackageVersion=1995/1996, Published=8-Jun-2000, Publisher="Altium Limited"
R1 R2 R3 R4 R5 R6 R7 R8 R9 R10 R11 R12 R13 R14 R15 R16 R17 R18 R19 R20 R21 R22 R23 R24 R25 R26 R27: library part CMP-1011-00001-2, Manufacturer="Yageo / Phycomp", Part Number=RC0402JR-070RL
SW1 SW2: library part SW-PB, "Switch", LatestRevisionDate=17-Jul-2002, LatestRevisionNote="Re-released for DXP Platform.", PackageDescription="Switch; 2 Leads", PackageReference=SPST-2, Published=24-Mar-1999, Publisher="Altium Limited"
TP1 TP2 TP3 TP4 TP5 TP6 TP7 TP8 TP9 TP10 TP11 TP12 TP13 TP14 TP15 TP16 TP17 TP18 TP19: library part CMP-2000-05575-2, "PC TEST POINT MINIATURE YELLOW", Manufacturer=Keystone, Automotive=No, Category=Conn, ComponentLink2Description=Datasheet, ComponentLink2URL=https://www.keyelco.com/product-pdf.cfm?p=1313, Contact Material=Silver, Device Class L1=Connectors, Device Class L2=unset, Device Class L3=unset, Digikey Description="PC TEST POINT MINIATURE YELLOW", Height=4.72mm, Is Female=yes, Lead Free=Yes, Manufacturer Part Number=5004, Mouser Description="TEST POINT PC MINI .040\"D YELLOW", Number of Contacts=1, Octopart=https://octopart.com/5004-keystone-28591, Package=5004, RoHS=TRUE
TVS1: library part CMP-2000-07540-2, "DIODE SCHOTTKY 200V POWERDI123", Capacitance=23pF, Forward Current=1A, Manufacturer="Diodes Inc.", Manufacturer Part Number=DFLS1200-7, Max Junction Temp=+175°C, Max Repetitive Reverse Voltage=200V, Max Surge Forward Current=40A, Package=PowerDI123, Peak Reverse Current=2uA, Temperature="-65°C to +175°C", Temperature Range Low=-65°C, Automotive=Yes, Automotive Grade="Grade 0", Category=Diode, ComponentLink2Description=Datasheet, ComponentLink2URL=https://www.diodes.com/assets/Datasheets/ds30628.pdf, Device Class L1="Discrete Semiconductors", Device Class L2=Diodes, Device Class L3="Schottky Diodes", Digikey Description="DIODE SCHOTTKY 200V POWERDI123", Footprint Url=https://www.diodes.com/assets/Package-Files/PowerDI123.pdf, Height=1mm, Lead Free=Yes, Mouser Description="Schottky Diodes & Rectifiers SCHOTTKY RECTIFIER", Octopart=https://octopart.com/dfls1200-7-diodes+inc.-13134059, Reverse Voltage=200V, RoHS=TRUE, Temperature Range High=+175°C
U1: library part CMP-05527-000002-1, "RF TXRX MOD BLUETOOTH CHIP ANT", Ambient Temperature Range High=+85°C, Ambient Temperature Range Low=-40°C, Manufacturer=Panasonic, Manufacturer Part Number=ENW-89846A1KF, Max Frequency=2.4GHz, Max Supply Voltage=3.3V, Min Supply Voltage=2.35V, Package=0, Receiving Current=4.9mA, Temperature="-40°C to +85°C", Automotive=No, Category=UNK, ComponentLink2Description=Datasheet, ComponentLink2URL=https://b2b-api.panasonic.eu/file_stream/pids/fileversion/4534, Data Rate=1Mbits/s, Device Class L1="Integrated Circuits (ICs)", Device Class L2="RF Semiconductors and Devices", Device Class L3=Transceivers, Digikey Description="RF TXRX MOD BLUETOOTH CHIP ANT", Height=2mm, Interface=I2C,SPI,UART, Lead Free=Yes, Number Of Adc Channels=4, Number Of Gpio=14, Octopart=https://octopart.com/enw-89846a1kf-panasonic-38566823, RoHS=TRUE, Sensitivity=-93dBm, Temperature Range High=+85°C, Temperature Range Low=-40°C, Transmitting Current=4.9mA
U2: library part CMP-0186-00092-2, "Infrared Encoder/Decoder, PDIP, Extended Temperature", Code_JEDEC=MS-001, ComponentLink1Description="Manufacturer URL", ComponentLink1URL=http://www.microchip.com/, ComponentLink2Description=Datasheet, ComponentLink2URL=http://ww1.microchip.com/downloads/en/DeviceDoc/21894c.pdf, ComponentLink3Description="Package Specification", ComponentLink3URL=http://www.microchip.com/stellent/groups/techpub_sg/documents/packagingspec/en012702.pdf, DatasheetVersion="revC, Feb-2007", PackageDescription="8-Lead Plastic Dual In-Line (P) - 300 mil Body [PDIP]", PackageReference=PDIP300-P8, PackageVersion="revBB, Aug-2009", RevisionNote="URLs added."
U3: library part CMP-05551-000001-1, "SENSOR DGTL 14SMD MODULE", Case/Package=SMD/SMT, Max Operating Temperature=80°C, Min Operating Temperature=-20°C, Output Type=I2C, Packaging="Tape and Reel", Sensing Method="Infrared (IR)"
U4: library part CMP-0326-00046-3, "ESD Solution for Super-Speed (6 Gbps) USB 3.0 Interface, 2 Channels, -40 to +85 degC, 3-pin SOT (DRT), Green (Rohs & No Sb/Br)", Breakdown Voltage(Min)(V)=9, Differential Capacitance(pF)=0.01, IO Capacitance(Typ)(pF)=0.7, IO Leakage Current(nA)=10, Manufacturer="Texas Instruments", PartNumber=TPD2EUSB30DRTR, 1394 / Firewire=TRUE, ComponentLink1Description=Datasheet, ComponentLink1URL=http://www.ti.com/general/docs/lit/getliterature.tsp?genericPartNumber=TPD2EUSB30&fileType=pdf, ComponentLink2Description="URL Link1", ComponentLink2URL=SamplesURL:http://www.ti.com/product/tpd2eusb30#samples, DatasheetVersion=SLVSAC2C, Eco-Plan="Green (RoHS & no Sb/Br)", HDMI=TRUE, IEC 61000-4-2 Air-Gap(+/- kV)=8, IEC 61000-4-2 Contact(+/- kV)=8, Mounting Technology="Surface Mount", PackageDescription="3-Flat Lead Plastic Small Outline, 1 x 1 mm (inc leads), 0.35 mm Pitch", PackageReference=DRT0003A, PackageVersion="revD, Jun-2008", Serial ATA / eSATA=TRUE, SubFamily="ESD Solution", USB Full Speed=TRUE, USB High Speed=TRUE, USB Super Speed=TRUE
U5: library part CMP-06276-000162-1, "IC MCU 32BIT 256KB FLASH 48QFN", Case/Package=QFN, Frequency=48MHz, Max Operating Temperature=85°C, Min Operating Temperature=-40°C, Core Architecture=ARM, Interface=I2C, Memory Size=256KB, Memory Type=FLASH, Number of I/Os=37, Oscillator Type=Internal, Packaging="Tape and Reel", Peripherals=POR, RoHS Compliant=Yes
U6: library part CMP-2000-04961-2, "TVS DIODE 5.5V 4SOP", Breakdown Voltage=11V, Capacitance=1.5pF, Case/Package=SOP, Clamping Voltage=105.5V, Leakage Current=1nA, Max Operating Temperature=85°C, Max Supply Voltage=5.5V, Min Operating Temperature=-40°C, Min Supply Voltage=900mV, Package Quantity=1, Power Line Protection=Yes, Test Current=10mA, Depth=1.4mm, Direction=Unidirectional, Element Configuration=Dual, ESD Protection=Yes, Height=1.07mm, Interface=LVDS, Lead Free="Lead Free", Length=3.04mm, Max Reverse Leakage Current=1nA, Min Breakdown Voltage=11V, Mount="Surface Mount", Number of Bidirectional Channels=2, Number of Channels=2, Number of Pins=4, Packaging="Tape and Reel", Radiation Hardening=No, REACH SVHC="No SVHC", Reverse Standoff Voltage=5.5V, RoHS Compliant=Yes, Termination=Solder, Width=1.4mm
Y1: library part XTAL, "Crystal Oscillator", LatestRevisionDate=17-Jul-2002, LatestRevisionNote="Re-released for DXP Platform.", PackageDescription="Crystal, Thru-Hole; 2 Leads; Body 3.1 x 8.2 mm (Dia.xH)", PackageReference=R38, Published=8-Jun-2000, Publisher="Altium Limited"
Y2: library part CMP-2000-05037-1, "Low Frequency Crystal, 32.768 KHz, -40 to 85 degC, 4-Pin SMD, RoHS, Tape and Reel", Case Height=2.5mm, Case Length=8mm, Case Width=3.8mm, Frequency=32.768kHz, Load Capacitance=12.5pF, Manufacturer=Abracon, Operating Temperature Range=-40Cto+85C, Package / Case=8mmx3.8mm, Package Description="4-Pin Surface Mount Device, Body 8 x 3.8 mm, Pitch 5.5 mm", Package Reference=ABS25, Tolerance=20PPM, Brand=ABRACON, Datasheet URL=https://datasheet.ciiva.com/7998/1700987-7998663.pdf, Datasheet Version=May-11, Dimensions=3.8mmWx8mmLx2.5mmH, ESR=50kOhms, Factory Pack Quantity=1000, Manufacturer URL=http://www.abracon.com/, Mounting Style=SMD/SMT, Packaging=Reel, Product Category=Crystals, RoHS=Details, Series=ABS25, Termination Style=SMD/SMT, Type=LowFrequencyCrystal
L1 L2 L5: Code_IEC=1005, Code_JEITA=0402, LatestRevisionDate=29-May-2009, LatestRevisionNote="IPC-7351 Footprint Added.", PackageDescription="Chip Inductor", PackageReference=0402-A, Published=8-Jun-2000, Publisher="Altium Limited"

## Free pads (board coordinates)
  round 60 hole 30: 15(3500,5390) 16(3400,5290) 17(3500,5290) 18(3400,5190) 19(3500,5190) 21(3500,5090) 22(3400,4990) 23(3500,4990) 24(3400,4870) 25(3500,4870) 26(3400,4770) 27(3500,4770) 28(3400,4670) 29(3500,4670) 30(3400,4570) 31(3500,4570) 32(3400,4470) 33(3500,4470) 34(3400,4350) 35(3500,4350) 36(3400,4250) 37(3500,4250) 38(3400,4150) 39(3500,4150) 40(3400,4050) 41(3500,4050) 42(3400,3950) 43(3500,3950) 44(3400,3835) 45(3500,3835) 46(3400,3735) 47(3500,3735) 48(3400,3635) 49(3500,3635) 50(3400,3535) 51(3500,3535) 52(3400,3435) 53(3500,3435) vcc(3400,5390) ""(3400,5090)
  round 0 hole 30 unplated: 55(3345,3180) 56(7235,2305) 57(4045,5480) 58(7270,5625)

## Via types
v1: diameter 50, hole 28, Top Layer to Bottom Layer, 69 vias

## Nets (pads, with @x,y where several pads share a name; then routed paths per layer and width w, separated by ;. In a path a pad name is that pad's centre, name@x,y a point inside that pad or via, vN(x,y) a via of type N, cw(c..) or ccw(c..) an arc to the next point about the centre after c; other vN are vias at no path point)
3.3V: J3.5 J11.1 | length 180.4
  Top Layer w10: J11.1 7070.66,4215 7095.66,4190 J3.5
5V: J3.4 J6.1 | length 227.1
  Top Layer w10: J3.4 7233.5,3966.5 7233.5,3951.5 J6.1
/XRES: C12.1 C13_1.1 C14_1.1 C25.1 R12.1 R13.1 R23.1 U5.40 | length 2801.7
  Top Layer w10: R23.1 4026.73,3872.2 C25.1 4034.53,3887.87 4110,3963.35 v1(4110,3970) ; C13_1.1 4095.77,4065 ; v1@4090,3970 v1(4110,3970) ; C14_1.1 4095.77,4065 ; v1(4165,4810) 4141.73,4833.27 R13.1 4142.72,5090 4184.29,5131.57 4294.57,5131.57 4328.27,5097.87 C12.1 4341.97,5076.3 4341.97,5058.58 4435.55,4965 R12.1 ; R12.1@4428.27,4961.73 4428.27,4960.91 4422.44,4955.08 4411.23,4955.08 4402.44,4946.29 4402.44,4717.56 4664.95,4455.05 U5.40@4834.17,4455.05 ; 4095.77,4065 4095.77,4024.62 4110,4010.38 v1(4110,3970)
  Bottom Layer w10: v1(4110,3970) 4165,4025 v1(4165,4810)
  other v1: 4110,3970
D2: J4.6 J13.1 R3.1 | length 4514.2
  Top Layer w10: v1(3740,2800) 3750,2800 3800,2850 R3.1 ; J13.1 7260,2960 J4.6
  Bottom Layer w10: v1(3740,2800) 3885,2800 3935,2750 4069.22,2750 4208.31,2610.91 4424.01,2610.91 4445.83,2589.09 4607.28,2589.09 4658.27,2640.08 4658.27,2649.92 4709.25,2700.91 5902.28,2700.91 5964.68,2638.5 7264.26,2638.5 7370,2744.24 7370,2775.76 7339.26,2806.5 7123.5,2806.5 J13.1
D3: J4.5 J15.1 R2.1 | length 3630.6
  Top Layer w10: R2.1 3885,2912.72 3917.28,2945 v1@3925,2945 ; J15.1 7200,2940 J4.5
  Bottom Layer w10: v1(3935,2950) 4005,2880 5247.63,2880 5353.46,2774.17 6442.21,2774.17 6529.53,2861.5 7036.5,2861.5 J15.1
D6: J4.2 J14.1 R6.2 U3.4 | length 1624.4
  Top Layer w10: v1(5955,3430) 6093.7,3430 6108.7,3415 6310,3415 v1(6365,3470) ; J14.1 7245,3435 J4.2
  Bottom Layer w10: U3.4 5985,3377.4 5962.65,3399.75 5962.65,3422.35 v1(5955,3430) 5985,3460 R6.2 ; v1(6365,3470) 6375.82,3470 6387.32,3481.5 7004.26,3481.5 7031.5,3454.26 7031.5,3442.01 7038.5,3435 J14.1
D7: J4.1 J8.1 R26.1 SW2.2 U1.2 | length 4660
  Top Layer w10: U1.2 3769.57,2707 3994.3,2931.73 4065,2931.73 4066.63,2933.37 4176.63,2933.37 SW2.2 ; J8.1 7220,3560 J4.1
  Bottom Layer w10: SW2.2 4180.98,2935 4215.98,2900 5255.92,2900 5361.74,2794.17 6074.17,2794.17 6080,2800 6439.75,2800 6521.25,2881.5 7028.21,2881.5 7068.5,2921.79 7068.5,2977.71 7077.29,2986.5 7152.71,2986.5 7161.5,2977.71 7161.5,2955.74 7167.35,2949.88 7175.64,2949.88 7274.02,3048.26 7274.02,3052.4 7274.02,3053.11 cw(c7320,3060) 7326.89,3105.98 7327.59,3105.98 7331.74,3105.98 7366.5,3140.74 7366.5,3379.26 7339.26,3406.5 7327.01,3406.5 7320,3413.5 J4.1
D14: J5.9 J9.1 R8.2 U3.2 | length 2640.7
  Top Layer w10: v1(5759.25,2940) 5759.25,2939.25 5782.27,2604.71 ccw(c5792.24,2605.44) 5782.28,2604.54 5782.47,2602.5 cw(c5772.51,2601.6) 5782.51,2601.6 5782.51,2552.49 5785.41,2549.59 J5.9 ; v1(5820,3435) 5893.43,3435 6173.43,3155 v1(6445,3155)
  Bottom Layer w10: v1(5759.25,2940) 5758.5,2940 5712.1,2986.4 5712.1,3190.38 5756.16,3234.45 5790.43,3234.45 5799.21,3243.24 5799.21,3254.21 5862.08,3317.08 5876.22,3317.08 5885,3325.86 U3.2 5885,3440 v1@5840,3440 ; R8.2@5795,3495 R8.2 R8.2@5795,3488.64 ; v1(5820,3435) 5825,3440 v1@5840,3440 ; v1(6445,3155) 6451.5,3148.5 7004.26,3148.5 7024.26,3168.5 7058.5,3168.5 J9.1 ; R8.2@5795,3488.64 5798.64,3488.64 5800.83,3486.46 5800.83,3479.17 v1@5840,3440 ; R8.2@5795,3488.64 5791.36,3488.64 5795,3485 R8.2@5795,3488.64
D15: J5.10 J12.1 R7.2 U3.3 | length 3252.5
  Top Layer w10: J5.10 5876.79,2522.54 cw(c5835,2500) 5789.91,2485.12 5780.14,2514.74 ccw(c5735,2500) 5749.74,2545.14 5720.12,2554.91 cw(c5735,2600) 5687.59,2602.64 5695,2735.86 5695,2900.86 5695,2909.14 5718.35,2954.09 5719.89,2956.73 cw(c5728.54,2951.72) 5721.47,2958.79 5752.68,2990 v1(5848.43,2990) ; v1@5885,3505 5950,3570 v1(6270,3570) ; v1(6490,3615) 6956.5,3148.5 7004.26,3148.5 7031.5,3175.74 7031.5,3225.7 7054.65,3248.85 7063.85,3248.85 7080,3265 J12.1
  Bottom Layer w10: v1(5848.43,2990) 5786.59,2990 5737.72,3038.87 5737.72,3157.24 5740,3159.52 5740,3190 5764.45,3214.45 5798.71,3214.45 5858.08,3273.82 5904.99,3273.82 5913.78,3282.61 5913.78,3287.96 5919.64,3293.82 5926.22,3293.82 5935,3302.6 5935,3377.4 5905,3407.4 5905,3467.28 5925,3487.28 R7.2 5924.13,3489.13 5870.87,3489.13 v1(5870,3490) ; v1@6275,3585 6305,3615 v1(6490,3615)
DIO: J1.3 U1.18 | length 282
  Top Layer w10: U1.18 3769.57,2290.32 3800,2259.89 J1.3
GND: C1.2 C2.2 C3.2 C5.1 C6.1 C7.1 C8.2 C9.2 C10.2 C11.2 C12.2 C13.1 C13_1.2 C14.1 C14_1.2 C15.2 C16.2 C17.1 C18.2 C19.2 C21.2 C22.2 C23.2 C24.2 C25.2 C26.2 C27.2 J3.2 J3.3 J5.7 J16.1 J16.2 J16.3 J16.4 J16.5 J16.6 J16.11 J17.6 J17.7 J17.8 J17.9 J18.1 pad.18 pad.26 pad.32 pad.42 pad.46 pad.53 Q1.3 Q2.3 R10.1 R11.1 R26.2 SW1.2 TVS1.2 U1.1 U1.7 U1.15 U1.17 U1.19 U1.20 U1.A U1.B U1.C U1.D U2.8 U3.6 U4.3 U5.5 U5.18 U5.35 U5.42 U6.1 Y2.2 Y2.3 | length 9235.1
  Top Layer w10: C3.2 3290.47,2414.53 C1.2 3300,2397.13 3333.7,2363.43 3427.4,2363.43 3442.68,2378.7 U1.D U1.B ; pad.46 3445,3690 3660.47,3690 3690,3719.53 3739.13,3719.53 3743.39,3715.28 J17.9 J17.8 J17.7 J17.6 3759.13,3807.01 3832.13,3880 C25.2 3961.77,3893.7 3961.77,4027.4 3945,4044.18 v1(3945,4055) 3987.24,4097.24 4036.3,4097.24 C22.2 4050.47,4110.47 C23.2 ; v1@3575,2775 3592.4,2757.6 U1.7 ; U1.15 3663.27,2533.77 3688.96,2559.47 3688.96,2563.14 3695.03,2569.21 3704.97,2569.21 3707.65,2566.52 3707.65,2560.25 3734.13,2533.77 U1.17 ; U2.8 3800,3485 C24.2@3800,3540.78 ; U1.19 3811.81,2478.19 3825.59,2478.19 U1.A ; U1.1 3837.6,2697.6 v1@3935,2795 ; U1.C U1.A ; C11.2 3929.53,4374.53 v1(3980,4425) 4011.77,4393.23 4051.3,4393.23 4070,4374.53 4094.53,4374.53 4100,4380 ; C13_1.2 3988.74,4271.5 ; Q1.3 4048.58,2460 3988.15,2520.43 U1.20 U1.A ; 4159.29,4320 4159.29,4116.38 C14_1.2@4202.8,4072.87 ; C12.2 4280,5079.21 SW1.2 ; C13.1 4520.77,3320 ; v1(4515,3225) 4520.77,3230.77 4520.77,3320 ; v1(4535,4420) 4540.16,4414.84 4586.72,4414.84 4586.87,4415 4689.59,4415 ; C14.1 4520.77,3320 ; 4689.59,4414.84 U5.42 ; C15.2@4784.53,4932.13 C16.2@4784.53,5145 ; C15.2 4789.53,4896.35 4792.6,4893.28 4792.6,4695 4880,4607.6 U5.35@4880,4540.83 ; C16.2 4789.53,5293.7 4805,5309.18 v1(4805,5320) ; v1(4910,4000) 4938.9,4028.9 U5.5@4938.9,4269.17 ; U5.18@5105.83,4394.84 5175.61,4394.84 5176.87,4393.58 5543.07,4393.58 5597.13,4339.53 C9.2 5612.87,4339.53 5627.87,4324.53 C8.2 6105.63,4324.53 6146.14,4365.04 TVS1.2 6159.96,4370 v1(6375,4370) ; C18.2@5309.53,3570 C19.2 ; C18.2 C18.2@5319.53,3565 ; v1(5420,3565) C18.2@5319.53,3565 ; C17.1@5439.53,3182.87 C17.1@5450,3172.4 ; C17.1@5450,3160 C17.1@5450,3172.4 ; C17.1 5520,3160 v1(5530,3150) ; C17.1@5454.53,3167.87 C17.1@5450,3172.4 ; v1@5600,5450 5603.27,5453.27 Y2.3 Y2.2 ; U6.1 6876.5,5150.08 C21.2@6975,5051.57 ; U4.3@7192.64,4700.83 U4.3 7243.53,4701.73 7259.47,4717.68 J16.6 7271.89,4751.22 7274.76,4754.09 J16.1 J16.2 J16.3 J16.4 J16.5 ; C18.2@5319.53,3565 5450,3434.53 C17.1@5450,3172.4
  Bottom Layer w10: v1(4805,5320) 4815.82,5320 4830.82,5335 Q2.3 ; v1(5420,3565) 5510.47,3565 5520.47,3555 ; C6.1 5520.47,3555 ; C7.1 5520.47,3440 5520.47,3555 ; C5.1 5930,2900 v1(5880,2850) 5910,2820 R11.1@5971.54,2820 ; U3.6 6085,3377.4 6093.78,3386.18 6151.18,3386.18 v1(6220,3455) 6185,3490 R10.1
  other v1: 3460,2375 3700,2585 3570,2785 3945,2800 5595,5460
INT: J14.2 U5.27 | length 2688.1
  Top Layer w10: U5.27@5041.35,4540.83 5041.35,4611.2 5180.15,4750 v1(5265,4750) ; v1(6110,4120) 6117.65,4127.65 6362.35,4127.65 6662,3828 6662,3812.24 6985,3489.24 J14.2
  Bottom Layer w10: v1(5265,4750) 5265,4708.14 5853.14,4120 v1(6110,4120)
Net10uH/NC_2: 10uH/NC.2 C10.1 C11.1 U5.41 | length 1037.1
  Top Layer w10: C11.1 3880,4320.47 C10.1 4075.47,4315 10uH/NC.2 4261.97,4315 4272.56,4325.59 4272.56,4331.06 4401.5,4460 4560,4460 4585,4435 U5.41@4834.17,4435
NetC1_1: C1.1 C2.1 L1.1 U1.8 | length 419.2
  Top Layer w10: C1.1 3359.53,2405.47 C2.1 3359.53,2552.87 3389.68,2583.03 L1.1 3391.65,2655 3398.82,2662.17 U1.8
NetC4_1: C4.1 R11.2 | length 130.9
  Bottom Layer w10: R11.2 6006.73,2861.73 6040,2895 6040,2930 C4.1
NetC4_2: C4.2 U3.10 | length 109.9
  Bottom Layer w10: U3.10 6035,3004.06 C4.2
NetC5_2: C5.2 U3.12 | length 112.4
  Bottom Layer w10: C5.2 5935,2994.53 U3.12
NetC6_2: C6.2 C7.2 L2.1 R6.1 R7.1 R8.1 R9.1 U3.13 | length 1709.3
  Bottom Layer w10: C6.2 5579.53,3520 ; C7.2 5579.53,3440 5579.53,3520 ; R8.1@5795,3520.71 5764.84,3520.71 5760,3520.71 ; R8.1 5795,3527.72 5800.83,3533.54 5805.23,3533.54 5806.68,3535 5911.73,3535 5918.19,3528.54 5919.17,3528.54 5925,3522.72 R7.1 5927.5,3519.23 5982.5,3519.23 R6.1 R9.1 ; U3.13 5885,3014.47 5888.43,3011.05 5888.43,2936.5 5851.93,2900 5741.93,2900 5675,2966.93 5675,3334.68 5764.84,3424.52 5764.84,3515.87 5760,3520.71 ; 5579.53,3520 5579.84,3519.68 L2.1 5741.02,3520.71 5760,3520.71
NetC13_2: C13.2 U5.1 Y1.2 | length 1133.6
  Top Layer w10: C13.2 4413.74,3526.5 Y1.2 4564.29,3677.05 4564.29,3837.58 4690,3963.28 4690,4055 4858.9,4223.9 U5.1@4858.9,4269.17
NetC14_2: C14.2 U5.2 Y1.1 | length 1089.2
  Top Layer w10: C14.2 4627.8,3327.87 4584.29,3371.38 Y1.1 4584.29,3829.29 4715,3960 4715,4050 4878.9,4213.9 U5.2@4878.9,4269.17
NetC18_1: C18.1 C19.1 L5.2 U5.6 | length 1190.9
  Top Layer w10: v1(4938.9,3910) 4938.9,3915.86 4958.9,3935.86 U5.6@4958.9,4269.17 ; v1(5125,3810) 5240.47,3810 C19.1 5250.47,3575 C18.1 5265,3560.47 L5.2
  Bottom Layer w10: v1(4938.9,3910) 5025,3910 v1(5125,3810)
NetC26_1: C26.1 U5.23 Y2.4 | length 1001.9
  Top Layer w10: U5.23 5128.5,4493.58 5397.68,4762.76 5397.68,4764.25 C26.1 5698.39,5064.96 Y2.4
NetC27_1: C27.1 J18.2 U5.24 Y2.1 | length 1557.2
  Top Layer w10: U5.24@5108.78,4516.22 5640,5047.44 5640,5262.55 5654.77,5277.32 5771.97,5277.32 5812.56,5236.73 Y2.1 ; C27.1 5824.37,5097.2 Y2.1 ; J18.2 5995,5395.55 5836.18,5236.73 Y2.1
NetD1_1: D1.1 R1.2 | length 253.5
  Top Layer w10: R1.2 4215,2335.47 D1.1
NetD2_1: D2.1 J6.2 | length 315.1
  Top Layer w10: D2.1 7260,4332.99 J6.2
NetD3_1: D3.1 R18.1 | length 90.8
  Top Layer w10: D3.1 5030,5665.47 R18.1
NetFB_2: FB.2 J16.7 | length 158.1
  Top Layer w10: FB.2@7131.13,4880.6 FB.2 7128.07,4889.8 7268.82,4889.8 J16.7
NetJ16_8: J16.8 R14.2 U4.2 | length 340.1
  Top Layer w10: R14.2 7118.82,4638.82 R14.2@7119.8,4638.82 ; U4.2 7157.36,4687.05 7157.36,4676.38 R14.2@7119.8,4638.82 ; J16.8 7387.91,4638.82 R14.2@7119.8,4638.82
NetJ16_9: J16.9 R16.2 U4.1 | length 771.2
  Top Layer w10: R16.2 7110.98,4781.73 7137.09,4755.63 7137.09,4736.69 U4.1 7173.63,4715.51 7177.19,4719.07 7157.09,4739.18 7157.09,4784.45 7082.44,4859.09 7082.44,4904.36 7118.08,4940 7279.14,4940 7326.26,4892.89 7326.26,4820.24 7346.39,4800.12 7347.91,4800.12 7388.03,4760 J16.9
NetQ1_1: Q1.1 R1.1 | length 113.3
  Top Layer w10: Q1.1 R1.1
NetQ1_2: Q1.2 U1.21 | length 272.4
  Top Layer w10: U1.21 4002.72,2555.87 4048.58,2510 Q1.2
NetQ2_1: Q2.1 R18.2 | length 217.4
  Top Layer w10: Q2.1 5020,5537.28 5030,5547.28 R18.2
NetQ2_2: Q2.2 U5.31 | length 798.5
  Top Layer w10: U5.31@4959.53,4540.83 4959.53,4960.11 4970,4970.58 Q2.2
NetR2_2: R2.2 U1.3 | length 243.2
  Top Layer w10: U1.3 3737.13,2700.59 3737.13,2729.41 3885,2877.28 R2.2
NetR3_2: R3.2 R25.2 U1.4 | length 415.7
  Top Layer w10: U1.4 3698.7,2819.09 3726.07,2846.46 3742.04,2846.46 3750.83,2855.24 3750.83,2871.21 3782.96,2903.35 3794.17,2903.35 3800,2909.17 R3.2 3800,2910.98 3855,2965.98 R25.2
NetR4_2: R4.2 R24.2 U1.5 | length 242
  Top Layer w10: U1.5 3661.63,2699.23 3661.63,2871.63 R24.2 R4.2
NetR5_2: R5.2 U1.6 | length 223.6
  Top Layer w10: R5.2 3595,2867.28 3627.83,2834.45 U1.6
NetR9_2: R9.2 R10.2 U3.5 | length 214.5
  Bottom Layer w10: U3.5 6035,3377.4 6050,3392.4 R9.2 R10.2@6115,3483.27
NetR13_2: R13.2 SW1.1 | length 182.3
  Top Layer w10: SW1.1 4080,5061.73 4101.46,5083.19 4101.46,5084.17 4107.28,5090 R13.2
NetR15_1: R15.1 U5.47 | length 242.9
  Top Layer w10: R15.1 4609.45,4275 4624.45,4290 4635,4290 4661.62,4316.62 U5.47@4834.17,4316.62
NetR17_1: R17.1 U5.48 | length 235.9
  Top Layer w10: R17.1@4660,4225 4660,4261.54 4669.23,4270.77 4669.78,4270.77 4670,4270.55 4670,4289.14 4676.37,4295.51 U5.48@4834.17,4295.51
NetR19_2: R19.2 U5.30 | length 377.3
  Top Layer w10: U5.30@4980.67,4540.83 4980.67,4682.13 4979.53,4683.27 4979.53,4825.1 4990,4835.57 R19.2
NetR20_2: R20.2 U5.29 | length 351.4
  Top Layer w10: U5.29@5001.35,4540.83 5001.35,4689.74 4999.53,4691.56 4999.53,4816.81 5038.37,4855.65 5038.37,4856.63 R20.2@5051.65,4869.92
NetR27_2: R27.2 SW2.1 | length 156.1
  Top Layer w10: R27.2 4151.54,2761.73 SW2.1
NetTP1_1: TP1.1 U1.24 | length 892.5
  Top Layer w10: U1.24 4227.77,2662.17 4246.51,2680.91 4689.25,2680.91 4715.16,2655 TP1.1
NetTP2_1: TP2.1 U1.23 | length 776.8
  Top Layer w10: U1.23 3818.98,2630.87 4584.13,2630.87 TP2.1
NetTP3_1: TP3.1 U1.22 | length 595.9
  Top Layer w10: U1.22 4030.83,2591.3 4040.28,2600.75 4400.23,2600.75 TP3.1@4411.88,2589.09 ; TP3.1@4380.07,2554.09 4390.98,2565 TP3.1
NetTP4_1: TP4.1 U5.39 | length 554.9
  Top Layer w10: TP4.1 4480,4670 4674.95,4475.05 U5.39@4834.17,4475.05
NetTP5_1: TP5.1 U5.38 | length 410.9
  Top Layer w10: TP5.1 4595,4620 4719.95,4495.05 U5.38@4834.17,4495.05
NetTP6_1: TP6.1 U5.37 | length 344.7
  Top Layer w10: TP6.1 4752.6,4757.4 4752.6,4571.57 4810.9,4513.27 U5.37
NetTP7_1: TP7.1 U5.3 | length 1067.2
  Top Layer w10: TP7.1 4835,3256.76 4815,3276.76 4815,4004.24 4898.9,4088.14 U5.3@4898.9,4269.17
NetTP8_1: TP8.1 U5.4 | length 795.8
  Top Layer w10: U5.4@4918.9,4269.17 4918.9,4068.42 4845,3994.52 4845,3610 TP8.1
NetTP9_1: TP9.1 U5.32 | length 1136
  Top Layer w10: TP9.1 4860,5460 4860,5020 4939.53,4940.47 U5.32@4939.53,4540.83
NetTP10_1: TP10.1 U5.19 | length 756.7
  Top Layer w10: U5.19 5185.16,4414.84 ; 5185.16,4413.58 5616.79,4413.58 5618.05,4414.84 5855.16,4414.84 TP10.1
NetTP11_1: TP11.1 U5.7 | length 943.5
  Top Layer w10: TP11.1 4978.9,3428.9 U5.7@4978.9,4275
NetTP12_1: TP12.1 U5.9 | length 1206.4
  Top Layer w10: U5.9@5018.9,4269.17 5018.9,3348.9 5004.09,3334.09 5004.09,3254.47 5035,3223.56 5035,3109.02 5029.91,3103.93 5029.91,3090.98 TP12.1@5035,3085.89
NetTP13_1: TP13.1 U5.10 | length 1013.3
  Top Layer w10: U5.10 5038.9,3382.82 5050,3371.72 5050,3310 TP13.1
NetTP14_1: TP14.1 U5.11 | length 1335.1
  Top Layer w10: U5.11@5060,4269.17 5060,3390 5145,3305 5145,3120 5096.26,3071.26 5096.26,3066.55 TP14.1
NetTP15_1: TP15.1 U5.12 | length 1278.1
  Top Layer w10: 5079.49,4250 5080,4249.49 5080,3415 5255,3240 5255,3080 TP15.1
NetTP16_1: TP16.1 U5.8 | length 1297.4
  Top Layer w10: TP16.1 4810,3060.38 4984.09,3234.47 4984.09,3342.38 4998.9,3357.18 U5.8@4998.9,4269.17
NetTP17_1: TP17.1 U5.20 | length 634.3
  Top Layer w10: U5.20@5105.83,4433.58 5608.5,4433.58 5644.92,4470 TP17.1
NetTP18_1: TP18.1 U5.21 | length 509.3
  Top Layer w10: U5.21@5105.83,4453.58 5563.58,4453.58 TP18.1
NetTP19_1: TP19.1 U5.22 | length 890.8
  Top Layer w10: U5.22@5105.83,4473.58 5502.18,4473.58 5578.6,4550 TP19.1
OTP: J1.1 U1.14 | length 280.9
  Top Layer w10: J1.1 3627.83,2282.83 U1.14
P1_4/SWCLK: J1.2 U1.16 | length 269.9
  Top Layer w10: U1.16 3699.35,2523.72 3699.35,2255.65 J1.2
P5LP2_0: J17.1 R21.1 | length 201.1
  Top Layer w10: J17.1 3966.46,3664.09 4005.55,3625 R21.1@4014.92,3625
P5LP2_1: J17.2 R22.2 | length 168.7
  Top Layer w10: J17.2 3830.53,3690.53 3997.74,3690.53 R22.2
P5LP2_4: J17.5 R23.2 | length 164.1
  Top Layer w10: J17.5 3830.98,3770.98 3992.28,3770.98 R23.2
RESET: J8.2 U5.28 | length 2696.3
  Top Layer w10: U5.28@5021.35,4540.83 5021.35,4625 5206.35,4810 v1(5320,4810) ; v1(6215,4170) 6370,4170 J8.2
  Bottom Layer w10: v1(5320,4810) 5320,4681.42 5816.42,4185 v1@6205,4185
RX: J4.7 J10.1 R4.1 | length 3838.4
  Top Layer w10: R4.1 3725,2940 3733.2,2948.2 3737.38,2948.2 3759.18,2970 v1(3770,2970) ; J10.1 7146.5,2711.5 7171.5,2711.5 J4.7
  Bottom Layer w10: v1(3770,2970) 3900,2840 4167.32,2840 4273.14,2734.17 7036.58,2734.17 7066.5,2704.26 7066.5,2692.01 7073.5,2685 J10.1
SCL: J12.2 pad.19 U5.26 | length 4818.4